# EAGLE board SparkFun_Qwiic_Accelerometer_BMA400-Panel (EAGLE 9.6.2), part 1 of 4
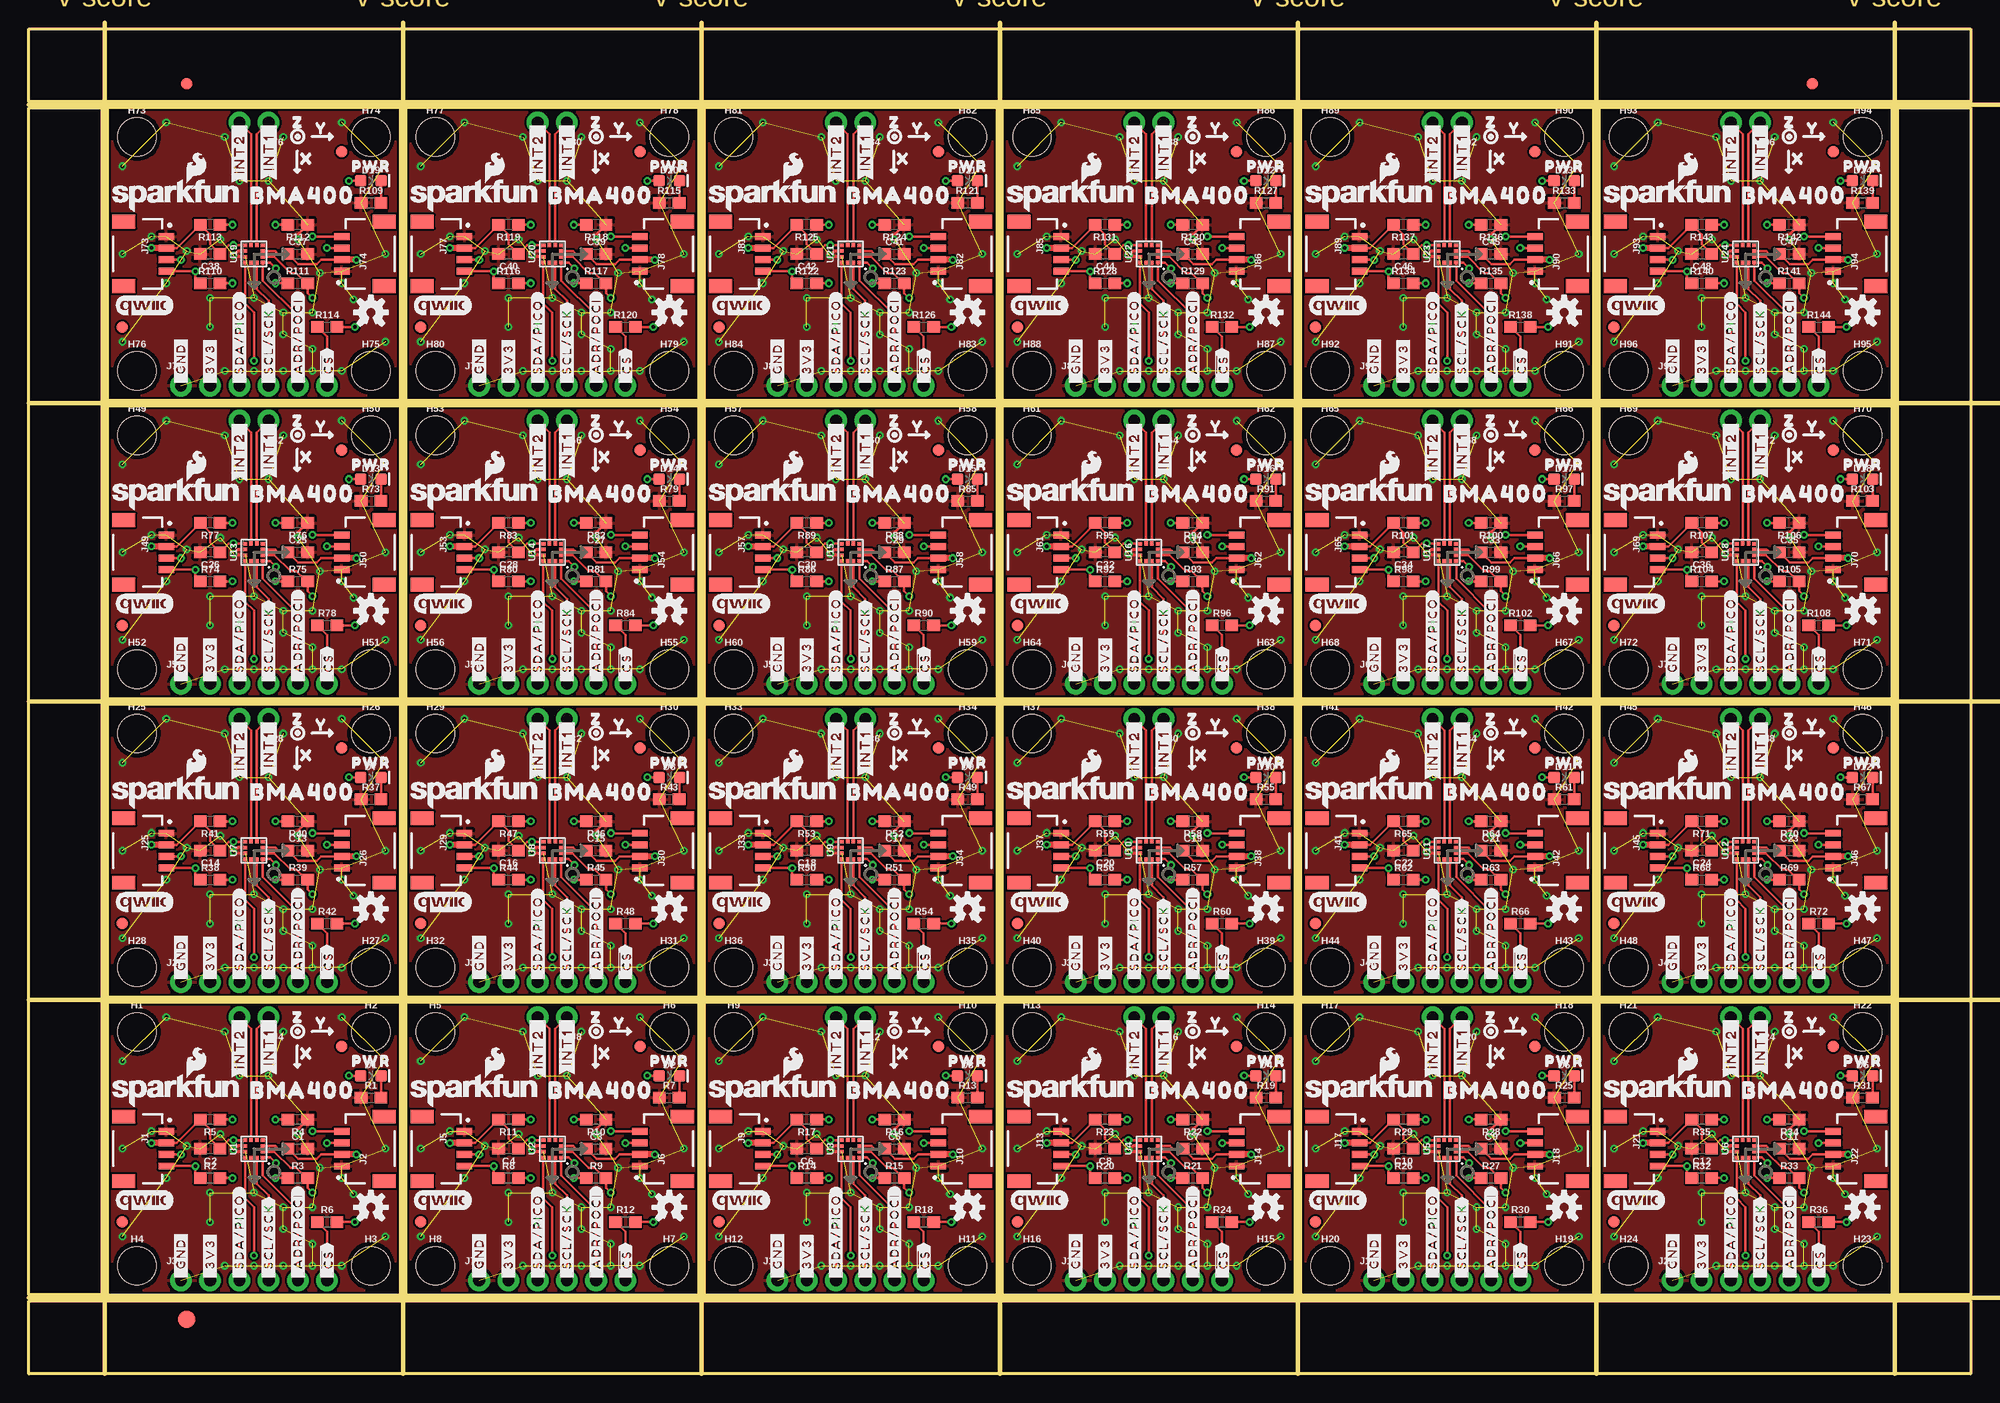
[diagram p0: board, top side]
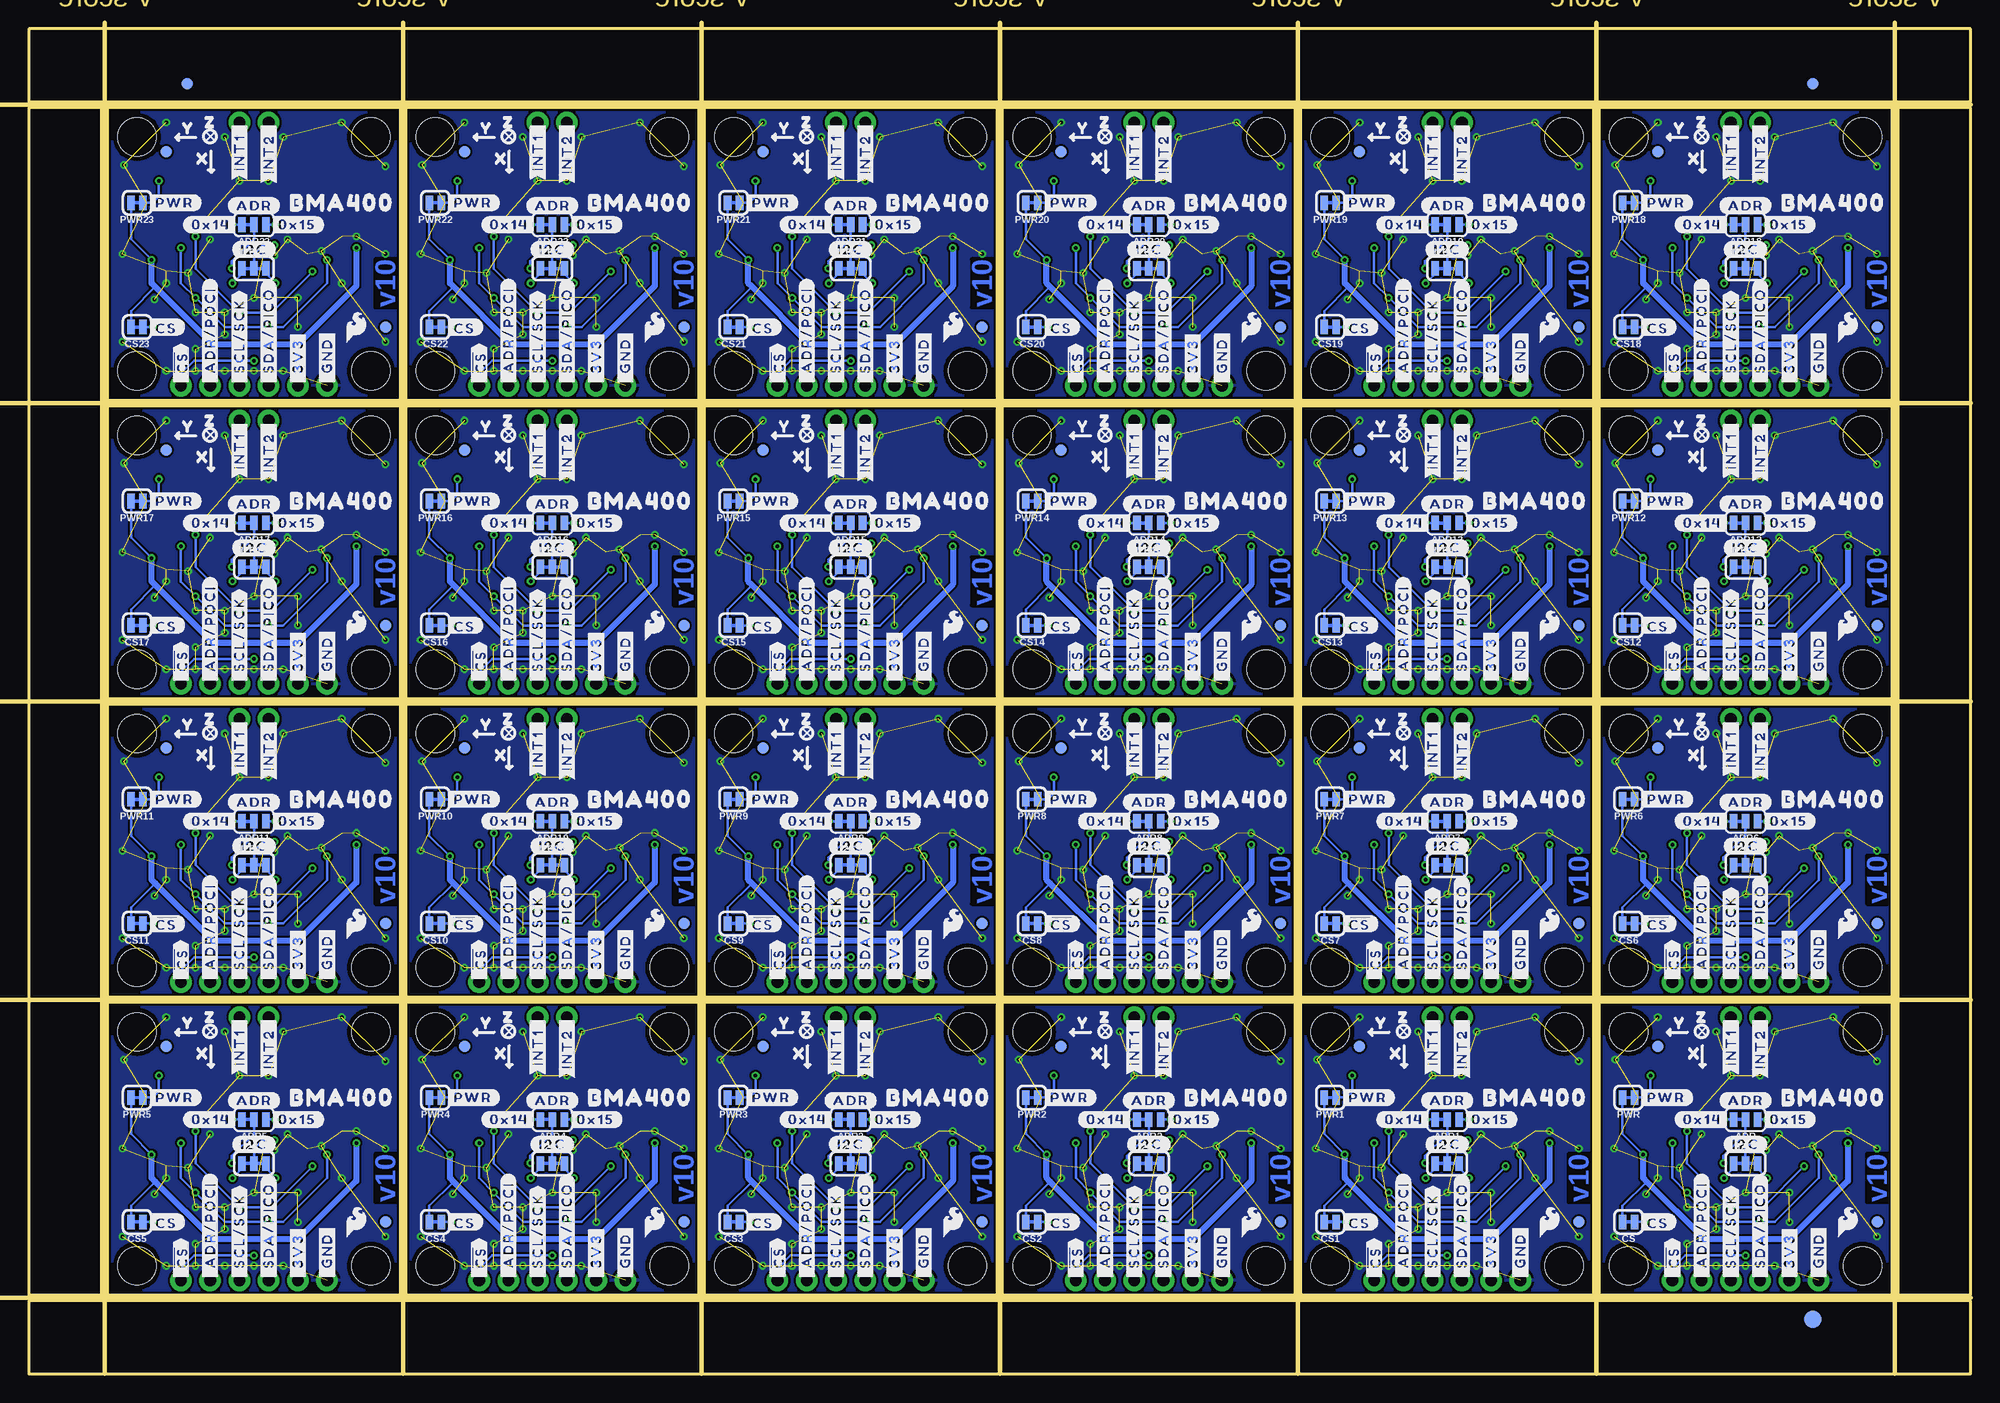
[diagram p1: board, bottom side, seen from below]

Size 168.66 x 116.84 mm. Coordinates in mm from the lower left corner, seen from the top.
Outline: 6.86,6.86 32.26,6.86 32.26,32.26 6.86,32.26 6.86,6.86
Outline: 32.77,6.86 58.17,6.86 58.17,32.26 32.77,32.26 32.77,6.86
Outline: 58.67,6.86 84.07,6.86 84.07,32.26 58.67,32.26 58.67,6.86
Outline: 84.58,6.86 109.98,6.86 109.98,32.26 84.58,32.26 84.58,6.86
Outline: 110.49,6.86 135.89,6.86 135.89,32.26 110.49,32.26 110.49,6.86
Outline: 136.4,6.86 161.8,6.86 161.8,32.26 136.4,32.26 136.4,6.86
Outline: 6.86,32.77 32.26,32.77 32.26,58.17 6.86,58.17 6.86,32.77
Outline: 32.77,32.77 58.17,32.77 58.17,58.17 32.77,58.17 32.77,32.77
Outline: 58.67,32.77 84.07,32.77 84.07,58.17 58.67,58.17 58.67,32.77
Outline: 84.58,32.77 109.98,32.77 109.98,58.17 84.58,58.17 84.58,32.77
Outline: 110.49,32.77 135.89,32.77 135.89,58.17 110.49,58.17 110.49,32.77
Outline: 136.4,32.77 161.8,32.77 161.8,58.17 136.4,58.17 136.4,32.77
Outline: 6.86,58.67 32.26,58.67 32.26,84.07 6.86,84.07 6.86,58.67
Outline: 32.77,58.67 58.17,58.67 58.17,84.07 32.77,84.07 32.77,58.67
Outline: 58.67,58.67 84.07,58.67 84.07,84.07 58.67,84.07 58.67,58.67
Outline: 84.58,58.67 109.98,58.67 109.98,84.07 84.58,84.07 84.58,58.67
Outline: 110.49,58.67 135.89,58.67 135.89,84.07 110.49,84.07 110.49,58.67
Outline: 136.4,58.67 161.8,58.67 161.8,84.07 136.4,84.07 136.4,58.67
Outline: 6.86,84.58 32.26,84.58 32.26,109.98 6.86,109.98 6.86,84.58
Outline: 32.77,84.58 58.17,84.58 58.17,109.98 32.77,109.98 32.77,84.58
Outline: 58.67,84.58 84.07,84.58 84.07,109.98 58.67,109.98 58.67,84.58
Outline: 84.58,84.58 109.98,84.58 109.98,109.98 84.58,109.98 84.58,84.58
Outline: 110.49,84.58 135.89,84.58 135.89,109.98 110.49,109.98 110.49,84.58
Outline: 136.4,84.58 161.8,84.58 161.8,109.98 136.4,109.98 136.4,84.58
Outline: 0,6.35 168.66,6.35 168.66,0 0,0 0,6.35
Outline: 162.31,109.98 168.66,109.98 168.66,6.86 162.31,6.86 162.31,109.98
Outline: 0,116.84 168.66,116.84 168.66,110.49 0,110.49 0,116.84
Outline: 0,109.98 6.35,109.98 6.35,6.86 0,6.86 0,109.98
Copper layers (1*16): Top 0.035mm / dielectric 1.5mm / Bottom 0.035mm
Design rules "SparkFun_Qwiic_Accelerometer_BMA400": minimum track width 7mil, minimum drill 0.3mm, track to track 7mil, track to pad 7mil, pad to pad 7mil, via to via 7mil, smd to smd 7mil, copper to edge 7mil, drill to drill 7mil, minimum pad ring 7mil, minimum via ring 7mil, stop-mask expansion 3mil, vias tented up to drill 25mil, thermal gap 10mil
tRestrict: area 18.7,19.5 to 18.8,19.6; area 44.6,19.5 to 44.8,19.6; area 70.5,19.5 to 70.7,19.6; area 96.4,19.5 to 96.6,19.6; area 122.4,19.5 to 122.5,19.6; area 148.3,19.5 to 148.4,19.6; area 18.7,45.4 to 18.8,45.5; area 44.6,45.4 to 44.8,45.5; area 70.5,45.4 to 70.7,45.5; area 96.4,45.4 to 96.6,45.5; area 122.4,45.4 to 122.5,45.5; area 148.3,45.4 to 148.4,45.5; area 18.7,71.3 to 18.8,71.4; area 44.6,71.3 to 44.8,71.4; area 70.5,71.3 to 70.7,71.4; area 96.4,71.3 to 96.6,71.4; area 122.4,71.3 to 122.5,71.4; area 148.3,71.3 to 148.4,71.4; area 18.7,97.3 to 18.8,97.3; area 44.6,97.3 to 44.8,97.3; area 70.5,97.3 to 70.7,97.3; area 96.4,97.3 to 96.6,97.3; area 122.4,97.3 to 122.5,97.3; area 148.3,97.3 to 148.4,97.3
bRestrict: area 18.3,20.6 to 18.5,21.2; area 44.2,20.6 to 44.4,21.2; area 70.1,20.6 to 70.4,21.2; area 96,20.6 to 96.3,21.2; area 121.9,20.6 to 122.2,21.2; area 147.8,20.6 to 148.1,21.2; area 18.3,46.5 to 18.5,47.1; area 44.2,46.5 to 44.4,47.1; area 70.1,46.5 to 70.4,47.1; area 96,46.5 to 96.3,47.1; area 121.9,46.5 to 122.2,47.1; area 147.8,46.5 to 148.1,47.1; area 18.3,72.4 to 18.5,73; area 44.2,72.4 to 44.4,73; area 70.1,72.4 to 70.4,73; area 96,72.4 to 96.3,73; area 121.9,72.4 to 122.2,73; area 147.8,72.4 to 148.1,73; area 18.3,98.3 to 18.5,98.9; area 44.2,98.3 to 44.4,98.9; area 70.1,98.3 to 70.4,98.9; area 96,98.3 to 96.3,98.9; area 121.9,98.3 to 122.2,98.9; area 147.8,98.3 to 148.1,98.9
Milling: 12 lines

## Footprints (pad centres in the part's own frame; a part is rotated, then mirrored left to right if it is on the bottom)
SMT-JUMPER_2_NC_TRACE_SILK = smd 0.66 x 1.27: 1 -0.521,0; 2 0.521,0
SMT-JUMPER_3_1-NC_TRACE_SILK = smd 0.66 x 1.27: 1 -1.041,0; 2 0,0; 3 1.041,0
0603 = smd 1.1 x 1: 1 -0.85,0; 2 0.85,0
LED-0603 = smd 1 x 1: A -0.877,0; C 0.877,0
FIDUCIAL-1X2 = smd 1 x 1: 1 0,0
FIDUCIAL-1.5X3 = smd 1.5 x 1.5: 1 0,0
STAND-OFF = hole 3.302: 0,0
SMT-JUMPER_3_2-NC_TRACE_SILK = smd 0.66 x 1.27: 1 -1.041,0; 2 0,0; 3 1.041,0
JST04_1MM_RA = smd 0.6 x 1.35: 1 -1.5,0; 2 -0.5,0; 3 0.5,0; 4 1.5,0 | smd 1.2 x 2: NC1 2.8,-3.675; NC2 -2.8,-3.675
1X06_NO_SILK = drill 1.016 pad 1.88: 1 0,0; 2 2.54,0; 3 5.08,0; 4 7.62,0; 5 10.16,0; 6 12.7,0
1X02_NO_SILK = drill 1.016 pad 1.88: 1 0,0; 2 2.54,0
BMA400 = smd 0.3 x 0.35: 1 -0.75,-0.775; 2 -0.25,-0.775; 3 0.25,-0.775; 4 0.75,-0.775; 7 0.75,0.775; 8 0.25,0.775; 9 -0.25,0.775; 10 -0.75,0.775 | smd 0.35 x 0.3: 5 0.775,-0.25; 6 0.775,0.25; 11 -0.775,0.25; 12 -0.775,-0.25

## Placement (x,y rotation side)
!CS!  JUMPER-SMT_2_NC_TRACE_SILK  [SMT-JUMPER_2_NC_TRACE_SILK]  29.72,13.21 180 bottom
!CS!1  JUMPER-SMT_2_NC_TRACE_SILK  [SMT-JUMPER_2_NC_TRACE_SILK]  55.63,13.21 180 bottom
!CS!2  JUMPER-SMT_2_NC_TRACE_SILK  [SMT-JUMPER_2_NC_TRACE_SILK]  81.53,13.21 180 bottom
!CS!3  JUMPER-SMT_2_NC_TRACE_SILK  [SMT-JUMPER_2_NC_TRACE_SILK]  107.44,13.21 180 bottom
!CS!4  JUMPER-SMT_2_NC_TRACE_SILK  [SMT-JUMPER_2_NC_TRACE_SILK]  133.35,13.21 180 bottom
!CS!5  JUMPER-SMT_2_NC_TRACE_SILK  [SMT-JUMPER_2_NC_TRACE_SILK]  159.26,13.21 180 bottom
!CS!6  JUMPER-SMT_2_NC_TRACE_SILK  [SMT-JUMPER_2_NC_TRACE_SILK]  29.72,39.12 180 bottom
!CS!7  JUMPER-SMT_2_NC_TRACE_SILK  [SMT-JUMPER_2_NC_TRACE_SILK]  55.63,39.12 180 bottom
!CS!8  JUMPER-SMT_2_NC_TRACE_SILK  [SMT-JUMPER_2_NC_TRACE_SILK]  81.53,39.12 180 bottom
!CS!9  JUMPER-SMT_2_NC_TRACE_SILK  [SMT-JUMPER_2_NC_TRACE_SILK]  107.44,39.12 180 bottom
!CS!10  JUMPER-SMT_2_NC_TRACE_SILK  [SMT-JUMPER_2_NC_TRACE_SILK]  133.35,39.12 180 bottom
!CS!11  JUMPER-SMT_2_NC_TRACE_SILK  [SMT-JUMPER_2_NC_TRACE_SILK]  159.26,39.12 180 bottom
!CS!12  JUMPER-SMT_2_NC_TRACE_SILK  [SMT-JUMPER_2_NC_TRACE_SILK]  29.72,65.02 180 bottom
!CS!13  JUMPER-SMT_2_NC_TRACE_SILK  [SMT-JUMPER_2_NC_TRACE_SILK]  55.63,65.02 180 bottom
!CS!14  JUMPER-SMT_2_NC_TRACE_SILK  [SMT-JUMPER_2_NC_TRACE_SILK]  81.53,65.02 180 bottom
!CS!15  JUMPER-SMT_2_NC_TRACE_SILK  [SMT-JUMPER_2_NC_TRACE_SILK]  107.44,65.02 180 bottom
!CS!16  JUMPER-SMT_2_NC_TRACE_SILK  [SMT-JUMPER_2_NC_TRACE_SILK]  133.35,65.02 180 bottom
!CS!17  JUMPER-SMT_2_NC_TRACE_SILK  [SMT-JUMPER_2_NC_TRACE_SILK]  159.26,65.02 180 bottom
!CS!18  JUMPER-SMT_2_NC_TRACE_SILK  [SMT-JUMPER_2_NC_TRACE_SILK]  29.72,90.93 180 bottom
!CS!19  JUMPER-SMT_2_NC_TRACE_SILK  [SMT-JUMPER_2_NC_TRACE_SILK]  55.63,90.93 180 bottom
!CS!20  JUMPER-SMT_2_NC_TRACE_SILK  [SMT-JUMPER_2_NC_TRACE_SILK]  81.53,90.93 180 bottom
!CS!21  JUMPER-SMT_2_NC_TRACE_SILK  [SMT-JUMPER_2_NC_TRACE_SILK]  107.44,90.93 180 bottom
!CS!22  JUMPER-SMT_2_NC_TRACE_SILK  [SMT-JUMPER_2_NC_TRACE_SILK]  133.35,90.93 180 bottom
!CS!23  JUMPER-SMT_2_NC_TRACE_SILK  [SMT-JUMPER_2_NC_TRACE_SILK]  159.26,90.93 180 bottom
ADR  JUMPER-SMT_3_1-NC_TRACE_SILK  [SMT-JUMPER_3_1-NC_TRACE_SILK]  19.56,22.1 180 bottom
ADR1  JUMPER-SMT_3_1-NC_TRACE_SILK  [SMT-JUMPER_3_1-NC_TRACE_SILK]  45.47,22.1 180 bottom
ADR2  JUMPER-SMT_3_1-NC_TRACE_SILK  [SMT-JUMPER_3_1-NC_TRACE_SILK]  71.37,22.1 180 bottom
ADR3  JUMPER-SMT_3_1-NC_TRACE_SILK  [SMT-JUMPER_3_1-NC_TRACE_SILK]  97.28,22.1 180 bottom
ADR4  JUMPER-SMT_3_1-NC_TRACE_SILK  [SMT-JUMPER_3_1-NC_TRACE_SILK]  123.19,22.1 180 bottom
ADR5  JUMPER-SMT_3_1-NC_TRACE_SILK  [SMT-JUMPER_3_1-NC_TRACE_SILK]  149.1,22.1 180 bottom
ADR6  JUMPER-SMT_3_1-NC_TRACE_SILK  [SMT-JUMPER_3_1-NC_TRACE_SILK]  19.56,48.01 180 bottom
ADR7  JUMPER-SMT_3_1-NC_TRACE_SILK  [SMT-JUMPER_3_1-NC_TRACE_SILK]  45.47,48.01 180 bottom
ADR8  JUMPER-SMT_3_1-NC_TRACE_SILK  [SMT-JUMPER_3_1-NC_TRACE_SILK]  71.37,48.01 180 bottom
ADR9  JUMPER-SMT_3_1-NC_TRACE_SILK  [SMT-JUMPER_3_1-NC_TRACE_SILK]  97.28,48.01 180 bottom
ADR10  JUMPER-SMT_3_1-NC_TRACE_SILK  [SMT-JUMPER_3_1-NC_TRACE_SILK]  123.19,48.01 180 bottom
ADR11  JUMPER-SMT_3_1-NC_TRACE_SILK  [SMT-JUMPER_3_1-NC_TRACE_SILK]  149.1,48.01 180 bottom
ADR12  JUMPER-SMT_3_1-NC_TRACE_SILK  [SMT-JUMPER_3_1-NC_TRACE_SILK]  19.56,73.91 180 bottom
ADR13  JUMPER-SMT_3_1-NC_TRACE_SILK  [SMT-JUMPER_3_1-NC_TRACE_SILK]  45.47,73.91 180 bottom
ADR14  JUMPER-SMT_3_1-NC_TRACE_SILK  [SMT-JUMPER_3_1-NC_TRACE_SILK]  71.37,73.91 180 bottom
ADR15  JUMPER-SMT_3_1-NC_TRACE_SILK  [SMT-JUMPER_3_1-NC_TRACE_SILK]  97.28,73.91 180 bottom
ADR16  JUMPER-SMT_3_1-NC_TRACE_SILK  [SMT-JUMPER_3_1-NC_TRACE_SILK]  123.19,73.91 180 bottom
ADR17  JUMPER-SMT_3_1-NC_TRACE_SILK  [SMT-JUMPER_3_1-NC_TRACE_SILK]  149.1,73.91 180 bottom
ADR18  JUMPER-SMT_3_1-NC_TRACE_SILK  [SMT-JUMPER_3_1-NC_TRACE_SILK]  19.56,99.82 180 bottom
ADR19  JUMPER-SMT_3_1-NC_TRACE_SILK  [SMT-JUMPER_3_1-NC_TRACE_SILK]  45.47,99.82 180 bottom
ADR20  JUMPER-SMT_3_1-NC_TRACE_SILK  [SMT-JUMPER_3_1-NC_TRACE_SILK]  71.37,99.82 180 bottom
ADR21  JUMPER-SMT_3_1-NC_TRACE_SILK  [SMT-JUMPER_3_1-NC_TRACE_SILK]  97.28,99.82 180 bottom
ADR22  JUMPER-SMT_3_1-NC_TRACE_SILK  [SMT-JUMPER_3_1-NC_TRACE_SILK]  123.19,99.82 180 bottom
ADR23  JUMPER-SMT_3_1-NC_TRACE_SILK  [SMT-JUMPER_3_1-NC_TRACE_SILK]  149.1,99.82 180 bottom
C1  0.1uF  [0603]  23.37,19.56 0 top
C2  0.1uF  [0603]  15.75,19.56 180 top
C3  0.1uF  [0603]  49.28,19.56 0 top
C4  0.1uF  [0603]  41.66,19.56 180 top
C5  0.1uF  [0603]  75.18,19.56 0 top
C6  0.1uF  [0603]  67.56,19.56 180 top
C7  0.1uF  [0603]  101.09,19.56 0 top
C8  0.1uF  [0603]  93.47,19.56 180 top
C9  0.1uF  [0603]  127,19.56 0 top
C10  0.1uF  [0603]  119.38,19.56 180 top
C11  0.1uF  [0603]  152.91,19.56 0 top
C12  0.1uF  [0603]  145.29,19.56 180 top
C13  0.1uF  [0603]  23.37,45.47 0 top
C14  0.1uF  [0603]  15.75,45.47 180 top
C15  0.1uF  [0603]  49.28,45.47 0 top
C16  0.1uF  [0603]  41.66,45.47 180 top
C17  0.1uF  [0603]  75.18,45.47 0 top
C18  0.1uF  [0603]  67.56,45.47 180 top
C19  0.1uF  [0603]  101.09,45.47 0 top
C20  0.1uF  [0603]  93.47,45.47 180 top
C21  0.1uF  [0603]  127,45.47 0 top
C22  0.1uF  [0603]  119.38,45.47 180 top
C23  0.1uF  [0603]  152.91,45.47 0 top
C24  0.1uF  [0603]  145.29,45.47 180 top
C25  0.1uF  [0603]  23.37,71.37 0 top
C26  0.1uF  [0603]  15.75,71.37 180 top
C27  0.1uF  [0603]  49.28,71.37 0 top
C28  0.1uF  [0603]  41.66,71.37 180 top
C29  0.1uF  [0603]  75.18,71.37 0 top
C30  0.1uF  [0603]  67.56,71.37 180 top
C31  0.1uF  [0603]  101.09,71.37 0 top
C32  0.1uF  [0603]  93.47,71.37 180 top
C33  0.1uF  [0603]  127,71.37 0 top
C34  0.1uF  [0603]  119.38,71.37 180 top
C35  0.1uF  [0603]  152.91,71.37 0 top
C36  0.1uF  [0603]  145.29,71.37 180 top
C37  0.1uF  [0603]  23.37,97.28 0 top
C38  0.1uF  [0603]  15.75,97.28 180 top
C39  0.1uF  [0603]  49.28,97.28 0 top
C40  0.1uF  [0603]  41.66,97.28 180 top
C41  0.1uF  [0603]  75.18,97.28 0 top
C42  0.1uF  [0603]  67.56,97.28 180 top
C43  0.1uF  [0603]  101.09,97.28 0 top
C44  0.1uF  [0603]  93.47,97.28 180 top
C45  0.1uF  [0603]  127,97.28 0 top
C46  0.1uF  [0603]  119.38,97.28 180 top
C47  0.1uF  [0603]  152.91,97.28 0 top
C48  0.1uF  [0603]  145.29,97.28 180 top
D1  RED  [LED-0603]  29.72,25.91 0 top
D2  RED  [LED-0603]  55.63,25.91 0 top
D3  RED  [LED-0603]  81.53,25.91 0 top
D4  RED  [LED-0603]  107.44,25.91 0 top
D5  RED  [LED-0603]  133.35,25.91 0 top
D6  RED  [LED-0603]  159.26,25.91 0 top
D7  RED  [LED-0603]  29.72,51.82 0 top
D8  RED  [LED-0603]  55.63,51.82 0 top
D9  RED  [LED-0603]  81.53,51.82 0 top
D10  RED  [LED-0603]  107.44,51.82 0 top
D11  RED  [LED-0603]  133.35,51.82 0 top
D12  RED  [LED-0603]  159.26,51.82 0 top
D13  RED  [LED-0603]  29.72,77.72 0 top
D14  RED  [LED-0603]  55.63,77.72 0 top
D15  RED  [LED-0603]  81.53,77.72 0 top
D16  RED  [LED-0603]  107.44,77.72 0 top
D17  RED  [LED-0603]  133.35,77.72 0 top
D18  RED  [LED-0603]  159.26,77.72 0 top
D19  RED  [LED-0603]  29.72,103.63 0 top
D20  RED  [LED-0603]  55.63,103.63 0 top
D21  RED  [LED-0603]  81.53,103.63 0 top
D22  RED  [LED-0603]  107.44,103.63 0 top
D23  RED  [LED-0603]  133.35,103.63 0 top
D24  RED  [LED-0603]  159.26,103.63 0 top
E$1  [FIDUCIAL-1X2]  13.72,112.08 0 top
E$2  [FIDUCIAL-1X2]  13.72,112.08 0 bottom
E$3  [FIDUCIAL-1X2]  154.88,112.08 0 top
E$4  [FIDUCIAL-1X2]  154.88,112.08 0 bottom
E$5  [FIDUCIAL-1.5X3]  13.72,4.76 0 top
E$6  [FIDUCIAL-1.5X3]  13.72,4.76 0 bottom
FD1  FIDUCIAL1X2  [FIDUCIAL-1X2]  27.18,28.45 0 top
FD2  FIDUCIAL1X2  [FIDUCIAL-1X2]  27.18,28.45 0 bottom
FD3  FIDUCIAL1X2  [FIDUCIAL-1X2]  8.13,13.21 0 bottom
FD4  FIDUCIAL1X2  [FIDUCIAL-1X2]  8.13,13.21 0 top
FD5  FIDUCIAL1X2  [FIDUCIAL-1X2]  53.09,28.45 0 top
FD6  FIDUCIAL1X2  [FIDUCIAL-1X2]  53.09,28.45 0 bottom
FD7  FIDUCIAL1X2  [FIDUCIAL-1X2]  34.04,13.21 0 bottom
FD8  FIDUCIAL1X2  [FIDUCIAL-1X2]  34.04,13.21 0 top
FD9  FIDUCIAL1X2  [FIDUCIAL-1X2]  78.99,28.45 0 top
FD10  FIDUCIAL1X2  [FIDUCIAL-1X2]  78.99,28.45 0 bottom
FD11  FIDUCIAL1X2  [FIDUCIAL-1X2]  59.94,13.21 0 bottom
FD12  FIDUCIAL1X2  [FIDUCIAL-1X2]  59.94,13.21 0 top
FD13  FIDUCIAL1X2  [FIDUCIAL-1X2]  104.9,28.45 0 top
FD14  FIDUCIAL1X2  [FIDUCIAL-1X2]  104.9,28.45 0 bottom
FD15  FIDUCIAL1X2  [FIDUCIAL-1X2]  85.85,13.21 0 bottom
FD16  FIDUCIAL1X2  [FIDUCIAL-1X2]  85.85,13.21 0 top
FD17  FIDUCIAL1X2  [FIDUCIAL-1X2]  130.81,28.45 0 top
FD18  FIDUCIAL1X2  [FIDUCIAL-1X2]  130.81,28.45 0 bottom
FD19  FIDUCIAL1X2  [FIDUCIAL-1X2]  111.76,13.21 0 bottom
FD20  FIDUCIAL1X2  [FIDUCIAL-1X2]  111.76,13.21 0 top
FD21  FIDUCIAL1X2  [FIDUCIAL-1X2]  156.72,28.45 0 top
FD22  FIDUCIAL1X2  [FIDUCIAL-1X2]  156.72,28.45 0 bottom
FD23  FIDUCIAL1X2  [FIDUCIAL-1X2]  137.67,13.21 0 bottom
FD24  FIDUCIAL1X2  [FIDUCIAL-1X2]  137.67,13.21 0 top
FD25  FIDUCIAL1X2  [FIDUCIAL-1X2]  27.18,54.36 0 top
FD26  FIDUCIAL1X2  [FIDUCIAL-1X2]  27.18,54.36 0 bottom
FD27  FIDUCIAL1X2  [FIDUCIAL-1X2]  8.13,39.12 0 bottom
FD28  FIDUCIAL1X2  [FIDUCIAL-1X2]  8.13,39.12 0 top
FD29  FIDUCIAL1X2  [FIDUCIAL-1X2]  53.09,54.36 0 top
FD30  FIDUCIAL1X2  [FIDUCIAL-1X2]  53.09,54.36 0 bottom
FD31  FIDUCIAL1X2  [FIDUCIAL-1X2]  34.04,39.12 0 bottom
FD32  FIDUCIAL1X2  [FIDUCIAL-1X2]  34.04,39.12 0 top
FD33  FIDUCIAL1X2  [FIDUCIAL-1X2]  78.99,54.36 0 top
FD34  FIDUCIAL1X2  [FIDUCIAL-1X2]  78.99,54.36 0 bottom
FD35  FIDUCIAL1X2  [FIDUCIAL-1X2]  59.94,39.12 0 bottom
FD36  FIDUCIAL1X2  [FIDUCIAL-1X2]  59.94,39.12 0 top
FD37  FIDUCIAL1X2  [FIDUCIAL-1X2]  104.9,54.36 0 top
FD38  FIDUCIAL1X2  [FIDUCIAL-1X2]  104.9,54.36 0 bottom
FD39  FIDUCIAL1X2  [FIDUCIAL-1X2]  85.85,39.12 0 bottom
FD40  FIDUCIAL1X2  [FIDUCIAL-1X2]  85.85,39.12 0 top
FD41  FIDUCIAL1X2  [FIDUCIAL-1X2]  130.81,54.36 0 top
FD42  FIDUCIAL1X2  [FIDUCIAL-1X2]  130.81,54.36 0 bottom
FD43  FIDUCIAL1X2  [FIDUCIAL-1X2]  111.76,39.12 0 bottom
FD44  FIDUCIAL1X2  [FIDUCIAL-1X2]  111.76,39.12 0 top
FD45  FIDUCIAL1X2  [FIDUCIAL-1X2]  156.72,54.36 0 top
FD46  FIDUCIAL1X2  [FIDUCIAL-1X2]  156.72,54.36 0 bottom
FD47  FIDUCIAL1X2  [FIDUCIAL-1X2]  137.67,39.12 0 bottom
FD48  FIDUCIAL1X2  [FIDUCIAL-1X2]  137.67,39.12 0 top
FD49  FIDUCIAL1X2  [FIDUCIAL-1X2]  27.18,80.26 0 top
FD50  FIDUCIAL1X2  [FIDUCIAL-1X2]  27.18,80.26 0 bottom
FD51  FIDUCIAL1X2  [FIDUCIAL-1X2]  8.13,65.02 0 bottom
FD52  FIDUCIAL1X2  [FIDUCIAL-1X2]  8.13,65.02 0 top
FD53  FIDUCIAL1X2  [FIDUCIAL-1X2]  53.09,80.26 0 top
FD54  FIDUCIAL1X2  [FIDUCIAL-1X2]  53.09,80.26 0 bottom
FD55  FIDUCIAL1X2  [FIDUCIAL-1X2]  34.04,65.02 0 bottom
FD56  FIDUCIAL1X2  [FIDUCIAL-1X2]  34.04,65.02 0 top
FD57  FIDUCIAL1X2  [FIDUCIAL-1X2]  78.99,80.26 0 top
FD58  FIDUCIAL1X2  [FIDUCIAL-1X2]  78.99,80.26 0 bottom
FD59  FIDUCIAL1X2  [FIDUCIAL-1X2]  59.94,65.02 0 bottom
FD60  FIDUCIAL1X2  [FIDUCIAL-1X2]  59.94,65.02 0 top
FD61  FIDUCIAL1X2  [FIDUCIAL-1X2]  104.9,80.26 0 top
FD62  FIDUCIAL1X2  [FIDUCIAL-1X2]  104.9,80.26 0 bottom
FD63  FIDUCIAL1X2  [FIDUCIAL-1X2]  85.85,65.02 0 bottom
FD64  FIDUCIAL1X2  [FIDUCIAL-1X2]  85.85,65.02 0 top
FD65  FIDUCIAL1X2  [FIDUCIAL-1X2]  130.81,80.26 0 top
FD66  FIDUCIAL1X2  [FIDUCIAL-1X2]  130.81,80.26 0 bottom
FD67  FIDUCIAL1X2  [FIDUCIAL-1X2]  111.76,65.02 0 bottom
FD68  FIDUCIAL1X2  [FIDUCIAL-1X2]  111.76,65.02 0 top
FD69  FIDUCIAL1X2  [FIDUCIAL-1X2]  156.72,80.26 0 top
FD70  FIDUCIAL1X2  [FIDUCIAL-1X2]  156.72,80.26 0 bottom
FD71  FIDUCIAL1X2  [FIDUCIAL-1X2]  137.67,65.02 0 bottom
FD72  FIDUCIAL1X2  [FIDUCIAL-1X2]  137.67,65.02 0 top
FD73  FIDUCIAL1X2  [FIDUCIAL-1X2]  27.18,106.17 0 top
FD74  FIDUCIAL1X2  [FIDUCIAL-1X2]  27.18,106.17 0 bottom
FD75  FIDUCIAL1X2  [FIDUCIAL-1X2]  8.13,90.93 0 bottom
FD76  FIDUCIAL1X2  [FIDUCIAL-1X2]  8.13,90.93 0 top
FD77  FIDUCIAL1X2  [FIDUCIAL-1X2]  53.09,106.17 0 top
FD78  FIDUCIAL1X2  [FIDUCIAL-1X2]  53.09,106.17 0 bottom
FD79  FIDUCIAL1X2  [FIDUCIAL-1X2]  34.04,90.93 0 bottom
FD80  FIDUCIAL1X2  [FIDUCIAL-1X2]  34.04,90.93 0 top
FD81  FIDUCIAL1X2  [FIDUCIAL-1X2]  78.99,106.17 0 top
FD82  FIDUCIAL1X2  [FIDUCIAL-1X2]  78.99,106.17 0 bottom
FD83  FIDUCIAL1X2  [FIDUCIAL-1X2]  59.94,90.93 0 bottom
FD84  FIDUCIAL1X2  [FIDUCIAL-1X2]  59.94,90.93 0 top
FD85  FIDUCIAL1X2  [FIDUCIAL-1X2]  104.9,106.17 0 top
FD86  FIDUCIAL1X2  [FIDUCIAL-1X2]  104.9,106.17 0 bottom
FD87  FIDUCIAL1X2  [FIDUCIAL-1X2]  85.85,90.93 0 bottom
FD88  FIDUCIAL1X2  [FIDUCIAL-1X2]  85.85,90.93 0 top
FD89  FIDUCIAL1X2  [FIDUCIAL-1X2]  130.81,106.17 0 top
FD90  FIDUCIAL1X2  [FIDUCIAL-1X2]  130.81,106.17 0 bottom
FD91  FIDUCIAL1X2  [FIDUCIAL-1X2]  111.76,90.93 0 bottom
FD92  FIDUCIAL1X2  [FIDUCIAL-1X2]  111.76,90.93 0 top
FD93  FIDUCIAL1X2  [FIDUCIAL-1X2]  156.72,106.17 0 top
FD94  FIDUCIAL1X2  [FIDUCIAL-1X2]  156.72,106.17 0 bottom
FD95  FIDUCIAL1X2  [FIDUCIAL-1X2]  137.67,90.93 0 bottom
FD96  FIDUCIAL1X2  [FIDUCIAL-1X2]  137.67,90.93 0 top
H1  STAND-OFF  [STAND-OFF]  9.4,29.72 0 top
H2  STAND-OFF  [STAND-OFF]  29.72,29.72 0 top
H3  STAND-OFF  [STAND-OFF]  29.72,9.4 0 top
H4  STAND-OFF  [STAND-OFF]  9.4,9.4 0 top
H5  STAND-OFF  [STAND-OFF]  35.31,29.72 0 top
H6  STAND-OFF  [STAND-OFF]  55.63,29.72 0 top
H7  STAND-OFF  [STAND-OFF]  55.63,9.4 0 top
H8  STAND-OFF  [STAND-OFF]  35.31,9.4 0 top
H9  STAND-OFF  [STAND-OFF]  61.21,29.72 0 top
H10  STAND-OFF  [STAND-OFF]  81.53,29.72 0 top
H11  STAND-OFF  [STAND-OFF]  81.53,9.4 0 top
H12  STAND-OFF  [STAND-OFF]  61.21,9.4 0 top
H13  STAND-OFF  [STAND-OFF]  87.12,29.72 0 top
H14  STAND-OFF  [STAND-OFF]  107.44,29.72 0 top
H15  STAND-OFF  [STAND-OFF]  107.44,9.4 0 top
H16  STAND-OFF  [STAND-OFF]  87.12,9.4 0 top
H17  STAND-OFF  [STAND-OFF]  113.03,29.72 0 top
H18  STAND-OFF  [STAND-OFF]  133.35,29.72 0 top
H19  STAND-OFF  [STAND-OFF]  133.35,9.4 0 top
H20  STAND-OFF  [STAND-OFF]  113.03,9.4 0 top
H21  STAND-OFF  [STAND-OFF]  138.94,29.72 0 top
H22  STAND-OFF  [STAND-OFF]  159.26,29.72 0 top
H23  STAND-OFF  [STAND-OFF]  159.26,9.4 0 top
H24  STAND-OFF  [STAND-OFF]  138.94,9.4 0 top
H25  STAND-OFF  [STAND-OFF]  9.4,55.63 0 top
H26  STAND-OFF  [STAND-OFF]  29.72,55.63 0 top
H27  STAND-OFF  [STAND-OFF]  29.72,35.31 0 top
H28  STAND-OFF  [STAND-OFF]  9.4,35.31 0 top
H29  STAND-OFF  [STAND-OFF]  35.31,55.63 0 top
H30  STAND-OFF  [STAND-OFF]  55.63,55.63 0 top
H31  STAND-OFF  [STAND-OFF]  55.63,35.31 0 top
H32  STAND-OFF  [STAND-OFF]  35.31,35.31 0 top
H33  STAND-OFF  [STAND-OFF]  61.21,55.63 0 top
H34  STAND-OFF  [STAND-OFF]  81.53,55.63 0 top
H35  STAND-OFF  [STAND-OFF]  81.53,35.31 0 top
H36  STAND-OFF  [STAND-OFF]  61.21,35.31 0 top
H37  STAND-OFF  [STAND-OFF]  87.12,55.63 0 top
H38  STAND-OFF  [STAND-OFF]  107.44,55.63 0 top
H39  STAND-OFF  [STAND-OFF]  107.44,35.31 0 top
H40  STAND-OFF  [STAND-OFF]  87.12,35.31 0 top
H41  STAND-OFF  [STAND-OFF]  113.03,55.63 0 top
H42  STAND-OFF  [STAND-OFF]  133.35,55.63 0 top
H43  STAND-OFF  [STAND-OFF]  133.35,35.31 0 top
H44  STAND-OFF  [STAND-OFF]  113.03,35.31 0 top
H45  STAND-OFF  [STAND-OFF]  138.94,55.63 0 top
H46  STAND-OFF  [STAND-OFF]  159.26,55.63 0 top
H47  STAND-OFF  [STAND-OFF]  159.26,35.31 0 top
H48  STAND-OFF  [STAND-OFF]  138.94,35.31 0 top
H49  STAND-OFF  [STAND-OFF]  9.4,81.53 0 top
H50  STAND-OFF  [STAND-OFF]  29.72,81.53 0 top
H51  STAND-OFF  [STAND-OFF]  29.72,61.21 0 top
H52  STAND-OFF  [STAND-OFF]  9.4,61.21 0 top
H53  STAND-OFF  [STAND-OFF]  35.31,81.53 0 top
H54  STAND-OFF  [STAND-OFF]  55.63,81.53 0 top
H55  STAND-OFF  [STAND-OFF]  55.63,61.21 0 top
H56  STAND-OFF  [STAND-OFF]  35.31,61.21 0 top
H57  STAND-OFF  [STAND-OFF]  61.21,81.53 0 top
H58  STAND-OFF  [STAND-OFF]  81.53,81.53 0 top
H59  STAND-OFF  [STAND-OFF]  81.53,61.21 0 top
H60  STAND-OFF  [STAND-OFF]  61.21,61.21 0 top
H61  STAND-OFF  [STAND-OFF]  87.12,81.53 0 top
H62  STAND-OFF  [STAND-OFF]  107.44,81.53 0 top
H63  STAND-OFF  [STAND-OFF]  107.44,61.21 0 top
H64  STAND-OFF  [STAND-OFF]  87.12,61.21 0 top
H65  STAND-OFF  [STAND-OFF]  113.03,81.53 0 top
H66  STAND-OFF  [STAND-OFF]  133.35,81.53 0 top
H67  STAND-OFF  [STAND-OFF]  133.35,61.21 0 top
H68  STAND-OFF  [STAND-OFF]  113.03,61.21 0 top
H69  STAND-OFF  [STAND-OFF]  138.94,81.53 0 top
H70  STAND-OFF  [STAND-OFF]  159.26,81.53 0 top
H71  STAND-OFF  [STAND-OFF]  159.26,61.21 0 top
H72  STAND-OFF  [STAND-OFF]  138.94,61.21 0 top
H73  STAND-OFF  [STAND-OFF]  9.4,107.44 0 top
H74  STAND-OFF  [STAND-OFF]  29.72,107.44 0 top
H75  STAND-OFF  [STAND-OFF]  29.72,87.12 0 top
H76  STAND-OFF  [STAND-OFF]  9.4,87.12 0 top
H77  STAND-OFF  [STAND-OFF]  35.31,107.44 0 top
H78  STAND-OFF  [STAND-OFF]  55.63,107.44 0 top
H79  STAND-OFF  [STAND-OFF]  55.63,87.12 0 top
H80  STAND-OFF  [STAND-OFF]  35.31,87.12 0 top
H81  STAND-OFF  [STAND-OFF]  61.21,107.44 0 top
H82  STAND-OFF  [STAND-OFF]  81.53,107.44 0 top
H83  STAND-OFF  [STAND-OFF]  81.53,87.12 0 top
H84  STAND-OFF  [STAND-OFF]  61.21,87.12 0 top
H85  STAND-OFF  [STAND-OFF]  87.12,107.44 0 top
H86  STAND-OFF  [STAND-OFF]  107.44,107.44 0 top
H87  STAND-OFF  [STAND-OFF]  107.44,87.12 0 top
H88  STAND-OFF  [STAND-OFF]  87.12,87.12 0 top
H89  STAND-OFF  [STAND-OFF]  113.03,107.44 0 top
H90  STAND-OFF  [STAND-OFF]  133.35,107.44 0 top
H91  STAND-OFF  [STAND-OFF]  133.35,87.12 0 top
H92  STAND-OFF  [STAND-OFF]  113.03,87.12 0 top
H93  STAND-OFF  [STAND-OFF]  138.94,107.44 0 top
H94  STAND-OFF  [STAND-OFF]  159.26,107.44 0 top
H95  STAND-OFF  [STAND-OFF]  159.26,87.12 0 top
H96  STAND-OFF  [STAND-OFF]  138.94,87.12 0 top
I2C  JUMPER-SMT_3_2-NC_TRACE_SILK  [SMT-JUMPER_3_2-NC_TRACE_SILK]  19.56,18.29 0 bottom
I2C1  JUMPER-SMT_3_2-NC_TRACE_SILK  [SMT-JUMPER_3_2-NC_TRACE_SILK]  45.47,18.29 0 bottom
I2C2  JUMPER-SMT_3_2-NC_TRACE_SILK  [SMT-JUMPER_3_2-NC_TRACE_SILK]  71.37,18.29 0 bottom
I2C3  JUMPER-SMT_3_2-NC_TRACE_SILK  [SMT-JUMPER_3_2-NC_TRACE_SILK]  97.28,18.29 0 bottom
I2C4  JUMPER-SMT_3_2-NC_TRACE_SILK  [SMT-JUMPER_3_2-NC_TRACE_SILK]  123.19,18.29 0 bottom
I2C5  JUMPER-SMT_3_2-NC_TRACE_SILK  [SMT-JUMPER_3_2-NC_TRACE_SILK]  149.1,18.29 0 bottom
I2C6  JUMPER-SMT_3_2-NC_TRACE_SILK  [SMT-JUMPER_3_2-NC_TRACE_SILK]  19.56,44.2 0 bottom
I2C7  JUMPER-SMT_3_2-NC_TRACE_SILK  [SMT-JUMPER_3_2-NC_TRACE_SILK]  45.47,44.2 0 bottom
I2C8  JUMPER-SMT_3_2-NC_TRACE_SILK  [SMT-JUMPER_3_2-NC_TRACE_SILK]  71.37,44.2 0 bottom
I2C9  JUMPER-SMT_3_2-NC_TRACE_SILK  [SMT-JUMPER_3_2-NC_TRACE_SILK]  97.28,44.2 0 bottom
I2C10  JUMPER-SMT_3_2-NC_TRACE_SILK  [SMT-JUMPER_3_2-NC_TRACE_SILK]  123.19,44.2 0 bottom
I2C11  JUMPER-SMT_3_2-NC_TRACE_SILK  [SMT-JUMPER_3_2-NC_TRACE_SILK]  149.1,44.2 0 bottom
I2C12  JUMPER-SMT_3_2-NC_TRACE_SILK  [SMT-JUMPER_3_2-NC_TRACE_SILK]  19.56,70.1 0 bottom
I2C13  JUMPER-SMT_3_2-NC_TRACE_SILK  [SMT-JUMPER_3_2-NC_TRACE_SILK]  45.47,70.1 0 bottom
I2C14  JUMPER-SMT_3_2-NC_TRACE_SILK  [SMT-JUMPER_3_2-NC_TRACE_SILK]  71.37,70.1 0 bottom
I2C15  JUMPER-SMT_3_2-NC_TRACE_SILK  [SMT-JUMPER_3_2-NC_TRACE_SILK]  97.28,70.1 0 bottom
I2C16  JUMPER-SMT_3_2-NC_TRACE_SILK  [SMT-JUMPER_3_2-NC_TRACE_SILK]  123.19,70.1 0 bottom
I2C17  JUMPER-SMT_3_2-NC_TRACE_SILK  [SMT-JUMPER_3_2-NC_TRACE_SILK]  149.1,70.1 0 bottom
I2C18  JUMPER-SMT_3_2-NC_TRACE_SILK  [SMT-JUMPER_3_2-NC_TRACE_SILK]  19.56,96.01 0 bottom
I2C19  JUMPER-SMT_3_2-NC_TRACE_SILK  [SMT-JUMPER_3_2-NC_TRACE_SILK]  45.47,96.01 0 bottom
I2C20  JUMPER-SMT_3_2-NC_TRACE_SILK  [SMT-JUMPER_3_2-NC_TRACE_SILK]  71.37,96.01 0 bottom
I2C21  JUMPER-SMT_3_2-NC_TRACE_SILK  [SMT-JUMPER_3_2-NC_TRACE_SILK]  97.28,96.01 0 bottom
I2C22  JUMPER-SMT_3_2-NC_TRACE_SILK  [SMT-JUMPER_3_2-NC_TRACE_SILK]  123.19,96.01 0 bottom
I2C23  JUMPER-SMT_3_2-NC_TRACE_SILK  [SMT-JUMPER_3_2-NC_TRACE_SILK]  149.1,96.01 0 bottom
J1  QWIIC_RIGHT_ANGLE  [JST04_1MM_RA]  11.94,19.56 270 top
J2  QWIIC_RIGHT_ANGLE  [JST04_1MM_RA]  27.18,19.56 90 top
J3  [1X06_NO_SILK]  13.21,8.13 0 top
J4  [1X02_NO_SILK]  20.83,30.99 180 top
J5  QWIIC_RIGHT_ANGLE  [JST04_1MM_RA]  37.85,19.56 270 top
J6  QWIIC_RIGHT_ANGLE  [JST04_1MM_RA]  53.09,19.56 90 top
J7  [1X06_NO_SILK]  39.12,8.13 0 top
J8  [1X02_NO_SILK]  46.74,30.99 180 top
J9  QWIIC_RIGHT_ANGLE  [JST04_1MM_RA]  63.75,19.56 270 top
J10  QWIIC_RIGHT_ANGLE  [JST04_1MM_RA]  78.99,19.56 90 top
J11  [1X06_NO_SILK]  65.02,8.13 0 top
J12  [1X02_NO_SILK]  72.64,30.99 180 top
J13  QWIIC_RIGHT_ANGLE  [JST04_1MM_RA]  89.66,19.56 270 top
J14  QWIIC_RIGHT_ANGLE  [JST04_1MM_RA]  104.9,19.56 90 top
J15  [1X06_NO_SILK]  90.93,8.13 0 top
J16  [1X02_NO_SILK]  98.55,30.99 180 top
J17  QWIIC_RIGHT_ANGLE  [JST04_1MM_RA]  115.57,19.56 270 top
J18  QWIIC_RIGHT_ANGLE  [JST04_1MM_RA]  130.81,19.56 90 top
J19  [1X06_NO_SILK]  116.84,8.13 0 top
J20  [1X02_NO_SILK]  124.46,30.99 180 top
J21  QWIIC_RIGHT_ANGLE  [JST04_1MM_RA]  141.48,19.56 270 top
J22  QWIIC_RIGHT_ANGLE  [JST04_1MM_RA]  156.72,19.56 90 top
J23  [1X06_NO_SILK]  142.75,8.13 0 top
J24  [1X02_NO_SILK]  150.37,30.99 180 top
J25  QWIIC_RIGHT_ANGLE  [JST04_1MM_RA]  11.94,45.47 270 top
J26  QWIIC_RIGHT_ANGLE  [JST04_1MM_RA]  27.18,45.47 90 top
J27  [1X06_NO_SILK]  13.21,34.04 0 top
J28  [1X02_NO_SILK]  20.83,56.9 180 top
J29  QWIIC_RIGHT_ANGLE  [JST04_1MM_RA]  37.85,45.47 270 top
J30  QWIIC_RIGHT_ANGLE  [JST04_1MM_RA]  53.09,45.47 90 top
J31  [1X06_NO_SILK]  39.12,34.04 0 top
J32  [1X02_NO_SILK]  46.74,56.9 180 top
J33  QWIIC_RIGHT_ANGLE  [JST04_1MM_RA]  63.75,45.47 270 top
J34  QWIIC_RIGHT_ANGLE  [JST04_1MM_RA]  78.99,45.47 90 top
J35  [1X06_NO_SILK]  65.02,34.04 0 top
J36  [1X02_NO_SILK]  72.64,56.9 180 top
J37  QWIIC_RIGHT_ANGLE  [JST04_1MM_RA]  89.66,45.47 270 top
J38  QWIIC_RIGHT_ANGLE  [JST04_1MM_RA]  104.9,45.47 90 top
J39  [1X06_NO_SILK]  90.93,34.04 0 top
J40  [1X02_NO_SILK]  98.55,56.9 180 top
J41  QWIIC_RIGHT_ANGLE  [JST04_1MM_RA]  115.57,45.47 270 top
J42  QWIIC_RIGHT_ANGLE  [JST04_1MM_RA]  130.81,45.47 90 top
J43  [1X06_NO_SILK]  116.84,34.04 0 top
J44  [1X02_NO_SILK]  124.46,56.9 180 top
J45  QWIIC_RIGHT_ANGLE  [JST04_1MM_RA]  141.48,45.47 270 top
J46  QWIIC_RIGHT_ANGLE  [JST04_1MM_RA]  156.72,45.47 90 top
J47  [1X06_NO_SILK]  142.75,34.04 0 top
J48  [1X02_NO_SILK]  150.37,56.9 180 top
J49  QWIIC_RIGHT_ANGLE  [JST04_1MM_RA]  11.94,71.37 270 top
J50  QWIIC_RIGHT_ANGLE  [JST04_1MM_RA]  27.18,71.37 90 top
J51  [1X06_NO_SILK]  13.21,59.94 0 top
J52  [1X02_NO_SILK]  20.83,82.8 180 top
J53  QWIIC_RIGHT_ANGLE  [JST04_1MM_RA]  37.85,71.37 270 top
J54  QWIIC_RIGHT_ANGLE  [JST04_1MM_RA]  53.09,71.37 90 top
J55  [1X06_NO_SILK]  39.12,59.94 0 top
J56  [1X02_NO_SILK]  46.74,82.8 180 top
J57  QWIIC_RIGHT_ANGLE  [JST04_1MM_RA]  63.75,71.37 270 top
J58  QWIIC_RIGHT_ANGLE  [JST04_1MM_RA]  78.99,71.37 90 top
J59  [1X06_NO_SILK]  65.02,59.94 0 top
J60  [1X02_NO_SILK]  72.64,82.8 180 top
J61  QWIIC_RIGHT_ANGLE  [JST04_1MM_RA]  89.66,71.37 270 top
J62  QWIIC_RIGHT_ANGLE  [JST04_1MM_RA]  104.9,71.37 90 top
J63  [1X06_NO_SILK]  90.93,59.94 0 top
J64  [1X02_NO_SILK]  98.55,82.8 180 top
J65  QWIIC_RIGHT_ANGLE  [JST04_1MM_RA]  115.57,71.37 270 top
J66  QWIIC_RIGHT_ANGLE  [JST04_1MM_RA]  130.81,71.37 90 top
J67  [1X06_NO_SILK]  116.84,59.94 0 top
J68  [1X02_NO_SILK]  124.46,82.8 180 top
J69  QWIIC_RIGHT_ANGLE  [JST04_1MM_RA]  141.48,71.37 270 top
J70  QWIIC_RIGHT_ANGLE  [JST04_1MM_RA]  156.72,71.37 90 top
J71  [1X06_NO_SILK]  142.75,59.94 0 top
J72  [1X02_NO_SILK]  150.37,82.8 180 top
J73  QWIIC_RIGHT_ANGLE  [JST04_1MM_RA]  11.94,97.28 270 top
J74  QWIIC_RIGHT_ANGLE  [JST04_1MM_RA]  27.18,97.28 90 top
J75  [1X06_NO_SILK]  13.21,85.85 0 top
J76  [1X02_NO_SILK]  20.83,108.71 180 top
J77  QWIIC_RIGHT_ANGLE  [JST04_1MM_RA]  37.85,97.28 270 top
J78  QWIIC_RIGHT_ANGLE  [JST04_1MM_RA]  53.09,97.28 90 top
J79  [1X06_NO_SILK]  39.12,85.85 0 top
J80  [1X02_NO_SILK]  46.74,108.71 180 top
J81  QWIIC_RIGHT_ANGLE  [JST04_1MM_RA]  63.75,97.28 270 top
J82  QWIIC_RIGHT_ANGLE  [JST04_1MM_RA]  78.99,97.28 90 top
J83  [1X06_NO_SILK]  65.02,85.85 0 top
J84  [1X02_NO_SILK]  72.64,108.71 180 top
J85  QWIIC_RIGHT_ANGLE  [JST04_1MM_RA]  89.66,97.28 270 top
J86  QWIIC_RIGHT_ANGLE  [JST04_1MM_RA]  104.9,97.28 90 top
J87  [1X06_NO_SILK]  90.93,85.85 0 top
J88  [1X02_NO_SILK]  98.55,108.71 180 top
J89  QWIIC_RIGHT_ANGLE  [JST04_1MM_RA]  115.57,97.28 270 top
J90  QWIIC_RIGHT_ANGLE  [JST04_1MM_RA]  130.81,97.28 90 top
J91  [1X06_NO_SILK]  116.84,85.85 0 top
J92  [1X02_NO_SILK]  124.46,108.71 180 top
J93  QWIIC_RIGHT_ANGLE  [JST04_1MM_RA]  141.48,97.28 270 top
J94  QWIIC_RIGHT_ANGLE  [JST04_1MM_RA]  156.72,97.28 90 top
J95  [1X06_NO_SILK]  142.75,85.85 0 top
J96  [1X02_NO_SILK]  150.37,108.71 180 top
LOGO1  QWIIC_LOGO_5MM  [QWIIC_5MM]  10.03,15.11 0 top
LOGO2  SFE_LOGO_NAME_FLAME.1_INCH  [SFE_LOGO_NAME_FLAME_.1]  12.83,24.64 0 top
LOGO3  OSHW-LOGOS  [OSHW-LOGO-S]  29.72,14.48 0 top
LOGO4  QWIIC_LOGO_5MM  [QWIIC_5MM]  35.94,15.11 0 top
LOGO5  SFE_LOGO_NAME_FLAME.1_INCH  [SFE_LOGO_NAME_FLAME_.1]  38.73,24.64 0 top
LOGO6  OSHW-LOGOS  [OSHW-LOGO-S]  55.63,14.48 0 top
LOGO7  QWIIC_LOGO_5MM  [QWIIC_5MM]  61.85,15.11 0 top
LOGO8  SFE_LOGO_NAME_FLAME.1_INCH  [SFE_LOGO_NAME_FLAME_.1]  64.64,24.64 0 top
LOGO9  OSHW-LOGOS  [OSHW-LOGO-S]  81.53,14.48 0 top
LOGO10  QWIIC_LOGO_5MM  [QWIIC_5MM]  87.76,15.11 0 top
LOGO11  SFE_LOGO_NAME_FLAME.1_INCH  [SFE_LOGO_NAME_FLAME_.1]  90.55,24.64 0 top
LOGO12  OSHW-LOGOS  [OSHW-LOGO-S]  107.44,14.48 0 top
LOGO13  QWIIC_LOGO_5MM  [QWIIC_5MM]  113.67,15.11 0 top
LOGO14  SFE_LOGO_NAME_FLAME.1_INCH  [SFE_LOGO_NAME_FLAME_.1]  116.46,24.64 0 top
LOGO15  OSHW-LOGOS  [OSHW-LOGO-S]  133.35,14.48 0 top
LOGO16  QWIIC_LOGO_5MM  [QWIIC_5MM]  139.57,15.11 0 top
LOGO17  SFE_LOGO_NAME_FLAME.1_INCH  [SFE_LOGO_NAME_FLAME_.1]  142.37,24.64 0 top
LOGO18  OSHW-LOGOS  [OSHW-LOGO-S]  159.26,14.48 0 top
LOGO19  QWIIC_LOGO_5MM  [QWIIC_5MM]  10.03,41.02 0 top
LOGO20  SFE_LOGO_NAME_FLAME.1_INCH  [SFE_LOGO_NAME_FLAME_.1]  12.83,50.55 0 top
LOGO21  OSHW-LOGOS  [OSHW-LOGO-S]  29.72,40.39 0 top
LOGO22  QWIIC_LOGO_5MM  [QWIIC_5MM]  35.94,41.02 0 top
LOGO23  SFE_LOGO_NAME_FLAME.1_INCH  [SFE_LOGO_NAME_FLAME_.1]  38.73,50.55 0 top
LOGO24  OSHW-LOGOS  [OSHW-LOGO-S]  55.63,40.39 0 top
LOGO25  QWIIC_LOGO_5MM  [QWIIC_5MM]  61.85,41.02 0 top
LOGO26  SFE_LOGO_NAME_FLAME.1_INCH  [SFE_LOGO_NAME_FLAME_.1]  64.64,50.55 0 top
LOGO27  OSHW-LOGOS  [OSHW-LOGO-S]  81.53,40.39 0 top
LOGO28  QWIIC_LOGO_5MM  [QWIIC_5MM]  87.76,41.02 0 top
LOGO29  SFE_LOGO_NAME_FLAME.1_INCH  [SFE_LOGO_NAME_FLAME_.1]  90.55,50.55 0 top
LOGO30  OSHW-LOGOS  [OSHW-LOGO-S]  107.44,40.39 0 top
LOGO31  QWIIC_LOGO_5MM  [QWIIC_5MM]  113.67,41.02 0 top
LOGO32  SFE_LOGO_NAME_FLAME.1_INCH  [SFE_LOGO_NAME_FLAME_.1]  116.46,50.55 0 top
LOGO33  OSHW-LOGOS  [OSHW-LOGO-S]  133.35,40.39 0 top
LOGO34  QWIIC_LOGO_5MM  [QWIIC_5MM]  139.57,41.02 0 top
LOGO35  SFE_LOGO_NAME_FLAME.1_INCH  [SFE_LOGO_NAME_FLAME_.1]  142.37,50.55 0 top
LOGO36  OSHW-LOGOS  [OSHW-LOGO-S]  159.26,40.39 0 top
LOGO37  QWIIC_LOGO_5MM  [QWIIC_5MM]  10.03,66.93 0 top
LOGO38  SFE_LOGO_NAME_FLAME.1_INCH  [SFE_LOGO_NAME_FLAME_.1]  12.83,76.45 0 top
LOGO39  OSHW-LOGOS  [OSHW-LOGO-S]  29.72,66.29 0 top
LOGO40  QWIIC_LOGO_5MM  [QWIIC_5MM]  35.94,66.93 0 top
LOGO41  SFE_LOGO_NAME_FLAME.1_INCH  [SFE_LOGO_NAME_FLAME_.1]  38.73,76.45 0 top
LOGO42  OSHW-LOGOS  [OSHW-LOGO-S]  55.63,66.29 0 top
LOGO43  QWIIC_LOGO_5MM  [QWIIC_5MM]  61.85,66.93 0 top
LOGO44  SFE_LOGO_NAME_FLAME.1_INCH  [SFE_LOGO_NAME_FLAME_.1]  64.64,76.45 0 top
LOGO45  OSHW-LOGOS  [OSHW-LOGO-S]  81.53,66.29 0 top
LOGO46  QWIIC_LOGO_5MM  [QWIIC_5MM]  87.76,66.93 0 top
LOGO47  SFE_LOGO_NAME_FLAME.1_INCH  [SFE_LOGO_NAME_FLAME_.1]  90.55,76.45 0 top
LOGO48  OSHW-LOGOS  [OSHW-LOGO-S]  107.44,66.29 0 top
LOGO49  QWIIC_LOGO_5MM  [QWIIC_5MM]  113.67,66.93 0 top
LOGO50  SFE_LOGO_NAME_FLAME.1_INCH  [SFE_LOGO_NAME_FLAME_.1]  116.46,76.45 0 top
LOGO51  OSHW-LOGOS  [OSHW-LOGO-S]  133.35,66.29 0 top
LOGO52  QWIIC_LOGO_5MM  [QWIIC_5MM]  139.57,66.93 0 top
LOGO53  SFE_LOGO_NAME_FLAME.1_INCH  [SFE_LOGO_NAME_FLAME_.1]  142.37,76.45 0 top
LOGO54  OSHW-LOGOS  [OSHW-LOGO-S]  159.26,66.29 0 top
LOGO55  QWIIC_LOGO_5MM  [QWIIC_5MM]  10.03,92.84 0 top
LOGO56  SFE_LOGO_NAME_FLAME.1_INCH  [SFE_LOGO_NAME_FLAME_.1]  12.83,102.36 0 top
LOGO57  OSHW-LOGOS  [OSHW-LOGO-S]  29.72,92.2 0 top
LOGO58  QWIIC_LOGO_5MM  [QWIIC_5MM]  35.94,92.84 0 top
LOGO59  SFE_LOGO_NAME_FLAME.1_INCH  [SFE_LOGO_NAME_FLAME_.1]  38.73,102.36 0 top
LOGO60  OSHW-LOGOS  [OSHW-LOGO-S]  55.63,92.2 0 top
LOGO61  QWIIC_LOGO_5MM  [QWIIC_5MM]  61.85,92.84 0 top
LOGO62  SFE_LOGO_NAME_FLAME.1_INCH  [SFE_LOGO_NAME_FLAME_.1]  64.64,102.36 0 top
LOGO63  OSHW-LOGOS  [OSHW-LOGO-S]  81.53,92.2 0 top
LOGO64  QWIIC_LOGO_5MM  [QWIIC_5MM]  87.76,92.84 0 top
LOGO65  SFE_LOGO_NAME_FLAME.1_INCH  [SFE_LOGO_NAME_FLAME_.1]  90.55,102.36 0 top
LOGO66  OSHW-LOGOS  [OSHW-LOGO-S]  107.44,92.2 0 top
LOGO67  QWIIC_LOGO_5MM  [QWIIC_5MM]  113.67,92.84 0 top
LOGO68  SFE_LOGO_NAME_FLAME.1_INCH  [SFE_LOGO_NAME_FLAME_.1]  116.46,102.36 0 top
LOGO69  OSHW-LOGOS  [OSHW-LOGO-S]  133.35,92.2 0 top
LOGO70  QWIIC_LOGO_5MM  [QWIIC_5MM]  139.57,92.84 0 top
LOGO71  SFE_LOGO_NAME_FLAME.1_INCH  [SFE_LOGO_NAME_FLAME_.1]  142.37,102.36 0 top
LOGO72  OSHW-LOGOS  [OSHW-LOGO-S]  159.26,92.2 0 top
PWR  JUMPER-SMT_2_NC_TRACE_SILK  [SMT-JUMPER_2_NC_TRACE_SILK]  29.72,24 180 bottom
PWR1  JUMPER-SMT_2_NC_TRACE_SILK  [SMT-JUMPER_2_NC_TRACE_SILK]  55.63,24 180 bottom
PWR2  JUMPER-SMT_2_NC_TRACE_SILK  [SMT-JUMPER_2_NC_TRACE_SILK]  81.53,24 180 bottom
PWR3  JUMPER-SMT_2_NC_TRACE_SILK  [SMT-JUMPER_2_NC_TRACE_SILK]  107.44,24 180 bottom
PWR4  JUMPER-SMT_2_NC_TRACE_SILK  [SMT-JUMPER_2_NC_TRACE_SILK]  133.35,24 180 bottom
PWR5  JUMPER-SMT_2_NC_TRACE_SILK  [SMT-JUMPER_2_NC_TRACE_SILK]  159.26,24 180 bottom
PWR6  JUMPER-SMT_2_NC_TRACE_SILK  [SMT-JUMPER_2_NC_TRACE_SILK]  29.72,49.91 180 bottom
PWR7  JUMPER-SMT_2_NC_TRACE_SILK  [SMT-JUMPER_2_NC_TRACE_SILK]  55.63,49.91 180 bottom
PWR8  JUMPER-SMT_2_NC_TRACE_SILK  [SMT-JUMPER_2_NC_TRACE_SILK]  81.53,49.91 180 bottom
PWR9  JUMPER-SMT_2_NC_TRACE_SILK  [SMT-JUMPER_2_NC_TRACE_SILK]  107.44,49.91 180 bottom
PWR10  JUMPER-SMT_2_NC_TRACE_SILK  [SMT-JUMPER_2_NC_TRACE_SILK]  133.35,49.91 180 bottom
PWR11  JUMPER-SMT_2_NC_TRACE_SILK  [SMT-JUMPER_2_NC_TRACE_SILK]  159.26,49.91 180 bottom
PWR12  JUMPER-SMT_2_NC_TRACE_SILK  [SMT-JUMPER_2_NC_TRACE_SILK]  29.72,75.82 180 bottom
PWR13  JUMPER-SMT_2_NC_TRACE_SILK  [SMT-JUMPER_2_NC_TRACE_SILK]  55.63,75.82 180 bottom
PWR14  JUMPER-SMT_2_NC_TRACE_SILK  [SMT-JUMPER_2_NC_TRACE_SILK]  81.53,75.82 180 bottom
PWR15  JUMPER-SMT_2_NC_TRACE_SILK  [SMT-JUMPER_2_NC_TRACE_SILK]  107.44,75.82 180 bottom
PWR16  JUMPER-SMT_2_NC_TRACE_SILK  [SMT-JUMPER_2_NC_TRACE_SILK]  133.35,75.82 180 bottom
PWR17  JUMPER-SMT_2_NC_TRACE_SILK  [SMT-JUMPER_2_NC_TRACE_SILK]  159.26,75.82 180 bottom
PWR18  JUMPER-SMT_2_NC_TRACE_SILK  [SMT-JUMPER_2_NC_TRACE_SILK]  29.72,101.73 180 bottom
PWR19  JUMPER-SMT_2_NC_TRACE_SILK  [SMT-JUMPER_2_NC_TRACE_SILK]  55.63,101.73 180 bottom
PWR20  JUMPER-SMT_2_NC_TRACE_SILK  [SMT-JUMPER_2_NC_TRACE_SILK]  81.53,101.73 180 bottom
PWR21  JUMPER-SMT_2_NC_TRACE_SILK  [SMT-JUMPER_2_NC_TRACE_SILK]  107.44,101.73 180 bottom
PWR22  JUMPER-SMT_2_NC_TRACE_SILK  [SMT-JUMPER_2_NC_TRACE_SILK]  133.35,101.73 180 bottom
PWR23  JUMPER-SMT_2_NC_TRACE_SILK  [SMT-JUMPER_2_NC_TRACE_SILK]  159.26,101.73 180 bottom
R1  1k  [0603]  29.72,24 0 top
R2  2.2k  [0603]  15.75,17.02 0 top
R3  2.2k  [0603]  23.37,17.02 0 top
R4  10k  [0603]  23.37,22.1 180 top
R5  10k  [0603]  15.75,22.1 180 top
R6  10k  [0603]  25.91,13.21 0 top
R7  1k  [0603]  55.63,24 0 top
R8  2.2k  [0603]  41.66,17.02 0 top
R9  2.2k  [0603]  49.28,17.02 0 top
R10  10k  [0603]  49.28,22.1 180 top
R11  10k  [0603]  41.66,22.1 180 top
R12  10k  [0603]  51.82,13.21 0 top
R13  1k  [0603]  81.53,24 0 top
R14  2.2k  [0603]  67.56,17.02 0 top
R15  2.2k  [0603]  75.18,17.02 0 top
R16  10k  [0603]  75.18,22.1 180 top
R17  10k  [0603]  67.56,22.1 180 top
R18  10k  [0603]  77.72,13.21 0 top
R19  1k  [0603]  107.44,24 0 top
R20  2.2k  [0603]  93.47,17.02 0 top
R21  2.2k  [0603]  101.09,17.02 0 top
R22  10k  [0603]  101.09,22.1 180 top
R23  10k  [0603]  93.47,22.1 180 top
R24  10k  [0603]  103.63,13.21 0 top
R25  1k  [0603]  133.35,24 0 top
R26  2.2k  [0603]  119.38,17.02 0 top
R27  2.2k  [0603]  127,17.02 0 top
R28  10k  [0603]  127,22.1 180 top
R29  10k  [0603]  119.38,22.1 180 top
R30  10k  [0603]  129.54,13.21 0 top
R31  1k  [0603]  159.26,24 0 top
R32  2.2k  [0603]  145.29,17.02 0 top
R33  2.2k  [0603]  152.91,17.02 0 top
R34  10k  [0603]  152.91,22.1 180 top
R35  10k  [0603]  145.29,22.1 180 top
R36  10k  [0603]  155.45,13.21 0 top
R37  1k  [0603]  29.72,49.91 0 top
R38  2.2k  [0603]  15.75,42.93 0 top
R39  2.2k  [0603]  23.37,42.93 0 top
R40  10k  [0603]  23.37,48.01 180 top
R41  10k  [0603]  15.75,48.01 180 top
R42  10k  [0603]  25.91,39.12 0 top
R43  1k  [0603]  55.63,49.91 0 top
R44  2.2k  [0603]  41.66,42.93 0 top
R45  2.2k  [0603]  49.28,42.93 0 top
R46  10k  [0603]  49.28,48.01 180 top
R47  10k  [0603]  41.66,48.01 180 top
R48  10k  [0603]  51.82,39.12 0 top
R49  1k  [0603]  81.53,49.91 0 top
R50  2.2k  [0603]  67.56,42.93 0 top
R51  2.2k  [0603]  75.18,42.93 0 top
R52  10k  [0603]  75.18,48.01 180 top
R53  10k  [0603]  67.56,48.01 180 top
R54  10k  [0603]  77.72,39.12 0 top
R55  1k  [0603]  107.44,49.91 0 top
R56  2.2k  [0603]  93.47,42.93 0 top
R57  2.2k  [0603]  101.09,42.93 0 top
R58  10k  [0603]  101.09,48.01 180 top
R59  10k  [0603]  93.47,48.01 180 top
R60  10k  [0603]  103.63,39.12 0 top
R61  1k  [0603]  133.35,49.91 0 top
R62  2.2k  [0603]  119.38,42.93 0 top
R63  2.2k  [0603]  127,42.93 0 top
R64  10k  [0603]  127,48.01 180 top
R65  10k  [0603]  119.38,48.01 180 top
R66  10k  [0603]  129.54,39.12 0 top
R67  1k  [0603]  159.26,49.91 0 top
R68  2.2k  [0603]  145.29,42.93 0 top
R69  2.2k  [0603]  152.91,42.93 0 top
R70  10k  [0603]  152.91,48.01 180 top
R71  10k  [0603]  145.29,48.01 180 top
R72  10k  [0603]  155.45,39.12 0 top
R73  1k  [0603]  29.72,75.82 0 top
R74  2.2k  [0603]  15.75,68.83 0 top
R75  2.2k  [0603]  23.37,68.83 0 top
R76  10k  [0603]  23.37,73.91 180 top
R77  10k  [0603]  15.75,73.91 180 top
R78  10k  [0603]  25.91,65.02 0 top
R79  1k  [0603]  55.63,75.82 0 top
R80  2.2k  [0603]  41.66,68.83 0 top
R81  2.2k  [0603]  49.28,68.83 0 top
R82  10k  [0603]  49.28,73.91 180 top
R83  10k  [0603]  41.66,73.91 180 top
R84  10k  [0603]  51.82,65.02 0 top
R85  1k  [0603]  81.53,75.82 0 top
R86  2.2k  [0603]  67.56,68.83 0 top
R87  2.2k  [0603]  75.18,68.83 0 top
R88  10k  [0603]  75.18,73.91 180 top
R89  10k  [0603]  67.56,73.91 180 top
R90  10k  [0603]  77.72,65.02 0 top
R91  1k  [0603]  107.44,75.82 0 top
R92  2.2k  [0603]  93.47,68.83 0 top
R93  2.2k  [0603]  101.09,68.83 0 top
R94  10k  [0603]  101.09,73.91 180 top
R95  10k  [0603]  93.47,73.91 180 top
R96  10k  [0603]  103.63,65.02 0 top
R97  1k  [0603]  133.35,75.82 0 top
R98  2.2k  [0603]  119.38,68.83 0 top
R99  2.2k  [0603]  127,68.83 0 top
R100  10k  [0603]  127,73.91 180 top
R101  10k  [0603]  119.38,73.91 180 top
R102  10k  [0603]  129.54,65.02 0 top
R103  1k  [0603]  159.26,75.82 0 top
R104  2.2k  [0603]  145.29,68.83 0 top
R105  2.2k  [0603]  152.91,68.83 0 top
R106  10k  [0603]  152.91,73.91 180 top
R107  10k  [0603]  145.29,73.91 180 top
R108  10k  [0603]  155.45,65.02 0 top
R109  1k  [0603]  29.72,101.73 0 top
R110  2.2k  [0603]  15.75,94.74 0 top
R111  2.2k  [0603]  23.37,94.74 0 top
R112  10k  [0603]  23.37,99.82 180 top
R113  10k  [0603]  15.75,99.82 180 top
R114  10k  [0603]  25.91,90.93 0 top
R115  1k  [0603]  55.63,101.73 0 top
R116  2.2k  [0603]  41.66,94.74 0 top
R117  2.2k  [0603]  49.28,94.74 0 top
R118  10k  [0603]  49.28,99.82 180 top
R119  10k  [0603]  41.66,99.82 180 top
R120  10k  [0603]  51.82,90.93 0 top
R121  1k  [0603]  81.53,101.73 0 top
R122  2.2k  [0603]  67.56,94.74 0 top
R123  2.2k  [0603]  75.18,94.74 0 top
R124  10k  [0603]  75.18,99.82 180 top
R125  10k  [0603]  67.56,99.82 180 top
R126  10k  [0603]  77.72,90.93 0 top
R127  1k  [0603]  107.44,101.73 0 top
R128  2.2k  [0603]  93.47,94.74 0 top
R129  2.2k  [0603]  101.09,94.74 0 top
R130  10k  [0603]  101.09,99.82 180 top
R131  10k  [0603]  93.47,99.82 180 top
R132  10k  [0603]  103.63,90.93 0 top
R133  1k  [0603]  133.35,101.73 0 top
R134  2.2k  [0603]  119.38,94.74 0 top
R135  2.2k  [0603]  127,94.74 0 top
R136  10k  [0603]  127,99.82 180 top
R137  10k  [0603]  119.38,99.82 180 top
R138  10k  [0603]  129.54,90.93 0 top
R139  1k  [0603]  159.26,101.73 0 top
R140  2.2k  [0603]  145.29,94.74 0 top
R141  2.2k  [0603]  152.91,94.74 0 top
R142  10k  [0603]  152.91,99.82 180 top
R143  10k  [0603]  145.29,99.82 180 top
R144  10k  [0603]  155.45,90.93 0 top
U1  BMA400  [BMA400]  19.56,19.56 90 top
U2  BMA400  [BMA400]  45.47,19.56 90 top
U3  BMA400  [BMA400]  71.37,19.56 90 top
U4  BMA400  [BMA400]  97.28,19.56 90 top
U5  BMA400  [BMA400]  123.19,19.56 90 top
U6  BMA400  [BMA400]  149.1,19.56 90 top
U7  BMA400  [BMA400]  19.56,45.47 90 top
U8  BMA400  [BMA400]  45.47,45.47 90 top
U9  BMA400  [BMA400]  71.37,45.47 90 top
U10  BMA400  [BMA400]  97.28,45.47 90 top
U11  BMA400  [BMA400]  123.19,45.47 90 top
U12  BMA400  [BMA400]  149.1,45.47 90 top
U13  BMA400  [BMA400]  19.56,71.37 90 top
U14  BMA400  [BMA400]  45.47,71.37 90 top
U15  BMA400  [BMA400]  71.37,71.37 90 top
U16  BMA400  [BMA400]  97.28,71.37 90 top
U17  BMA400  [BMA400]  123.19,71.37 90 top
U18  BMA400  [BMA400]  149.1,71.37 90 top
U19  BMA400  [BMA400]  19.56,97.28 90 top
U20  BMA400  [BMA400]  45.47,97.28 90 top
U21  BMA400  [BMA400]  71.37,97.28 90 top
U22  BMA400  [BMA400]  97.28,97.28 90 top
U23  BMA400  [BMA400]  123.19,97.28 90 top
U24  BMA400  [BMA400]  149.1,97.28 90 top
U$1  [PWR0]  29.72,27.18 0 top
U$2  [X2114]  24,27.81 0 bottom
U$3  [Y2115]  25.27,30.48 0 bottom
U$4  [#INT1_#0]  20.83,30.99 90 top
U$5  [#INT2_#0]  18.29,30.99 90 top
U$6  [#_3V3#6]  15.75,8.13 90 top
U$7  [#_SDA#PICO#5]  18.29,8.13 90 top
U$8  [#_#CS##2]  25.91,8.13 90 top
U$9  [#_SCL#SCK#3]  20.83,8.13 90 top
U$10  [#_GND#0]  13.21,8.13 90 bottom
U$11  [#_3V3#0]  15.75,8.13 90 bottom
U$12  [#_SDA#PICO#0]  18.29,8.13 90 bottom
U$13  [#_SCL#SCK#0]  20.83,8.13 90 bottom
U$14  [#_ADR#POCI#0]  23.37,8.13 90 bottom
U$15  [#_#CS##0]  25.91,8.13 90 bottom
U$16  [#I2C#0]  19.56,19.94 0 bottom
U$17  [#ADR#0]  19.56,23.75 0 bottom
U$18  [#0X15#0]  18.16,22.1 0 bottom
U$19  [#0X14#0]  20.95,22.1 0 bottom
U$20  [#INT1_#0]  20.83,30.99 90 bottom
U$21  [#INT2_#0]  18.29,30.99 90 bottom
U$22  [#PWR#0]  28.83,24 0 bottom
U$23  [BMA4000]  23.75,24.64 0 top
U$24  [BMA4000]  11.94,24 0 bottom
U$25  [##CS##0]  28.83,13.21 0 bottom
U$26  [SFE_LOGO_FLAME_.1]  10.67,13.21 0 bottom
U$27  [#_ADR#POCI#1]  23.37,8.13 90 top
U$28  [#_GND#6]  13.21,8.13 90 top
U$29  [Z2116]  23.37,30.99 0 bottom
U$30  [PWR0]  55.63,27.18 0 top
U$31  [#INT1_#0]  46.74,30.99 90 top
U$32  [#INT2_#0]  44.2,30.99 90 top
U$33  [#_GND#0]  39.12,8.13 90 bottom
U$34  [X2114]  24.13,27.81 0 top
U$35  [Y2115]  25.4,30.48 0 top
U$36  [Z2116]  23.37,30.99 0 top
U$37  [#_3V3#0]  41.66,8.13 90 bottom
U$38  [#_SDA#PICO#0]  44.2,8.13 90 bottom
U$39  [#_SCL#SCK#0]  46.74,8.13 90 bottom
U$40  [#_ADR#POCI#0]  49.28,8.13 90 bottom
U$41  [#_#CS##0]  51.82,8.13 90 bottom
U$42  [#I2C#0]  45.47,19.94 0 bottom
U$43  [#ADR#0]  45.47,23.75 0 bottom
U$44  [#0X15#0]  44.07,22.1 0 bottom
U$45  [#0X14#0]  46.86,22.1 0 bottom
U$46  [#INT1_#0]  46.74,30.99 90 bottom
U$47  [#INT2_#0]  44.2,30.99 90 bottom
U$48  [#PWR#0]  54.74,24 0 bottom
U$49  [BMA4000]  49.66,24.64 0 top
U$50  [BMA4000]  37.85,24 0 bottom
U$51  [##CS##0]  54.74,13.21 0 bottom
U$52  [SFE_LOGO_FLAME_.1]  36.58,13.21 0 bottom
U$53  [#_ADR#POCI#1]  49.28,8.13 90 top
U$54  [#_#CS##2]  51.82,8.13 90 top
U$55  [#_SCL#SCK#3]  46.74,8.13 90 top
U$56  [#_SDA#PICO#5]  44.2,8.13 90 top
U$57  [#_3V3#6]  41.66,8.13 90 top
U$58  [#_GND#6]  39.12,8.13 90 top
U$59  [X2114]  50.04,27.81 0 top
U$60  [Y2115]  51.31,30.48 0 top
U$61  [Z2116]  49.28,30.99 0 top
U$62  [X2114]  49.91,27.81 0 bottom
U$63  [Y2115]  51.18,30.48 0 bottom
U$64  [Z2116]  49.28,30.99 0 bottom
U$65  [PWR0]  81.53,27.18 0 top
U$66  [#INT1_#0]  72.64,30.99 90 top
U$67  [#INT2_#0]  70.1,30.99 90 top
U$68  [#_GND#0]  65.02,8.13 90 bottom
U$69  [#_3V3#0]  67.56,8.13 90 bottom
U$70  [#_SDA#PICO#0]  70.1,8.13 90 bottom
U$71  [#_SCL#SCK#0]  72.64,8.13 90 bottom
U$72  [#_ADR#POCI#0]  75.18,8.13 90 bottom
U$73  [#_#CS##0]  77.72,8.13 90 bottom
U$74  [#I2C#0]  71.37,19.94 0 bottom
U$75  [#ADR#0]  71.37,23.75 0 bottom
U$76  [#0X15#0]  69.98,22.1 0 bottom
U$77  [#0X14#0]  72.77,22.1 0 bottom
U$78  [#INT1_#0]  72.64,30.99 90 bottom
U$79  [#INT2_#0]  70.1,30.99 90 bottom
U$80  [#PWR#0]  80.65,24 0 bottom
U$81  [BMA4000]  75.56,24.64 0 top
U$82  [BMA4000]  63.75,24 0 bottom
U$83  [##CS##0]  80.65,13.21 0 bottom
U$84  [SFE_LOGO_FLAME_.1]  62.48,13.21 0 bottom
U$85  [#_ADR#POCI#1]  75.18,8.13 90 top
U$86  [#_#CS##2]  77.72,8.13 90 top
U$87  [#_SCL#SCK#3]  72.64,8.13 90 top
U$88  [#_SDA#PICO#5]  70.1,8.13 90 top
U$89  [#_3V3#6]  67.56,8.13 90 top
U$90  [#_GND#6]  65.02,8.13 90 top
U$91  [X2114]  75.95,27.81 0 top
U$92  [Y2115]  77.22,30.48 0 top
U$93  [Z2116]  75.18,30.99 0 top
U$94  [X2114]  75.82,27.81 0 bottom
U$95  [Y2115]  77.09,30.48 0 bottom
U$96  [Z2116]  75.18,30.99 0 bottom
U$97  [PWR0]  107.44,27.18 0 top
U$98  [#INT1_#0]  98.55,30.99 90 top
U$99  [#INT2_#0]  96.01,30.99 90 top
U$100  [#_GND#0]  90.93,8.13 90 bottom
U$101  [#_3V3#0]  93.47,8.13 90 bottom
U$102  [#_SDA#PICO#0]  96.01,8.13 90 bottom
U$103  [#_SCL#SCK#0]  98.55,8.13 90 bottom
U$104  [#_ADR#POCI#0]  101.09,8.13 90 bottom
U$105  [#_#CS##0]  103.63,8.13 90 bottom
U$106  [#I2C#0]  97.28,19.94 0 bottom
U$107  [#ADR#0]  97.28,23.75 0 bottom
U$108  [#0X15#0]  95.89,22.1 0 bottom
U$109  [#0X14#0]  98.68,22.1 0 bottom
U$110  [#INT1_#0]  98.55,30.99 90 bottom
U$111  [#INT2_#0]  96.01,30.99 90 bottom
U$112  [#PWR#0]  106.55,24 0 bottom
U$113  [BMA4000]  101.47,24.64 0 top
U$114  [BMA4000]  89.66,24 0 bottom
U$115  [##CS##0]  106.55,13.21 0 bottom
U$116  [SFE_LOGO_FLAME_.1]  88.39,13.21 0 bottom
U$117  [#_ADR#POCI#1]  101.09,8.13 90 top
U$118  [#_#CS##2]  103.63,8.13 90 top
U$119  [#_SCL#SCK#3]  98.55,8.13 90 top
U$120  [#_SDA#PICO#5]  96.01,8.13 90 top
U$121  [#_3V3#6]  93.47,8.13 90 top
U$122  [#_GND#6]  90.93,8.13 90 top
U$123  [X2114]  101.85,27.81 0 top
U$124  [Y2115]  103.12,30.48 0 top
U$125  [Z2116]  101.09,30.99 0 top
U$126  [X2114]  101.73,27.81 0 bottom
U$127  [Y2115]  103,30.48 0 bottom
U$128  [Z2116]  101.09,30.99 0 bottom
U$129  [PWR0]  133.35,27.18 0 top
U$130  [#INT1_#0]  124.46,30.99 90 top
U$131  [#INT2_#0]  121.92,30.99 90 top
U$132  [#_GND#0]  116.84,8.13 90 bottom
U$133  [#_3V3#0]  119.38,8.13 90 bottom
U$134  [#_SDA#PICO#0]  121.92,8.13 90 bottom
U$135  [#_SCL#SCK#0]  124.46,8.13 90 bottom
U$136  [#_ADR#POCI#0]  127,8.13 90 bottom
U$137  [#_#CS##0]  129.54,8.13 90 bottom
U$138  [#I2C#0]  123.19,19.94 0 bottom
U$139  [#ADR#0]  123.19,23.75 0 bottom
U$140  [#0X15#0]  121.79,22.1 0 bottom
U$141  [#0X14#0]  124.59,22.1 0 bottom
U$142  [#INT1_#0]  124.46,30.99 90 bottom
U$143  [#INT2_#0]  121.92,30.99 90 bottom
U$144  [#PWR#0]  132.46,24 0 bottom
U$145  [BMA4000]  127.38,24.64 0 top
U$146  [BMA4000]  115.57,24 0 bottom
U$147  [##CS##0]  132.46,13.21 0 bottom
U$148  [SFE_LOGO_FLAME_.1]  114.3,13.21 0 bottom
U$149  [#_ADR#POCI#1]  127,8.13 90 top
U$150  [#_#CS##2]  129.54,8.13 90 top
U$151  [#_SCL#SCK#3]  124.46,8.13 90 top
U$152  [#_SDA#PICO#5]  121.92,8.13 90 top
U$153  [#_3V3#6]  119.38,8.13 90 top
U$154  [#_GND#6]  116.84,8.13 90 top
U$155  [X2114]  127.76,27.81 0 top
U$156  [Y2115]  129.03,30.48 0 top
U$157  [Z2116]  127,30.99 0 top
U$158  [X2114]  127.64,27.81 0 bottom
U$159  [Y2115]  128.91,30.48 0 bottom
U$160  [Z2116]  127,30.99 0 bottom
U$161  [PWR0]  159.26,27.18 0 top
U$162  [#INT1_#0]  150.37,30.99 90 top
U$163  [#INT2_#0]  147.83,30.99 90 top
U$164  [#_GND#0]  142.75,8.13 90 bottom
U$165  [#_3V3#0]  145.29,8.13 90 bottom
U$166  [#_SDA#PICO#0]  147.83,8.13 90 bottom
U$167  [#_SCL#SCK#0]  150.37,8.13 90 bottom
U$168  [#_ADR#POCI#0]  152.91,8.13 90 bottom
U$169  [#_#CS##0]  155.45,8.13 90 bottom
U$170  [#I2C#0]  149.1,19.94 0 bottom
U$171  [#ADR#0]  149.1,23.75 0 bottom
U$172  [#0X15#0]  147.7,22.1 0 bottom
U$173  [#0X14#0]  150.5,22.1 0 bottom
U$174  [#INT1_#0]  150.37,30.99 90 bottom
U$175  [#INT2_#0]  147.83,30.99 90 bottom
U$176  [#PWR#0]  158.37,24 0 bottom
U$177  [BMA4000]  153.29,24.64 0 top
U$178  [BMA4000]  141.48,24 0 bottom
U$179  [##CS##0]  158.37,13.21 0 bottom
U$180  [SFE_LOGO_FLAME_.1]  140.21,13.21 0 bottom
U$181  [#_ADR#POCI#1]  152.91,8.13 90 top
U$182  [#_#CS##2]  155.45,8.13 90 top
U$183  [#_SCL#SCK#3]  150.37,8.13 90 top
U$184  [#_SDA#PICO#5]  147.83,8.13 90 top
U$185  [#_3V3#6]  145.29,8.13 90 top
U$186  [#_GND#6]  142.75,8.13 90 top
U$187  [X2114]  153.67,27.81 0 top
U$188  [Y2115]  154.94,30.48 0 top
U$189  [Z2116]  152.91,30.99 0 top
U$190  [X2114]  153.54,27.81 0 bottom
U$191  [Y2115]  154.81,30.48 0 bottom
U$192  [Z2116]  152.91,30.99 0 bottom
U$193  [PWR0]  29.72,53.09 0 top
U$194  [#INT1_#0]  20.83,56.9 90 top
U$195  [#INT2_#0]  18.29,56.9 90 top
U$196  [#_GND#0]  13.21,34.04 90 bottom
U$197  [#_3V3#0]  15.75,34.04 90 bottom
U$198  [#_SDA#PICO#0]  18.29,34.04 90 bottom
U$199  [#_SCL#SCK#0]  20.83,34.04 90 bottom
U$200  [#_ADR#POCI#0]  23.37,34.04 90 bottom
U$201  [#_#CS##0]  25.91,34.04 90 bottom
U$202  [#I2C#0]  19.56,45.85 0 bottom
U$203  [#ADR#0]  19.56,49.66 0 bottom
U$204  [#0X15#0]  18.16,48.01 0 bottom
U$205  [#0X14#0]  20.95,48.01 0 bottom
U$206  [#INT1_#0]  20.83,56.9 90 bottom
U$207  [#INT2_#0]  18.29,56.9 90 bottom
U$208  [#PWR#0]  28.83,49.91 0 bottom
U$209  [BMA4000]  23.75,50.55 0 top
U$210  [BMA4000]  11.94,49.91 0 bottom
U$211  [##CS##0]  28.83,39.12 0 bottom
U$212  [SFE_LOGO_FLAME_.1]  10.67,39.12 0 bottom
U$213  [#_ADR#POCI#1]  23.37,34.04 90 top
U$214  [#_#CS##2]  25.91,34.04 90 top
U$215  [#_SCL#SCK#3]  20.83,34.04 90 top
U$216  [#_SDA#PICO#5]  18.29,34.04 90 top
U$217  [#_3V3#6]  15.75,34.04 90 top
U$218  [#_GND#6]  13.21,34.04 90 top
U$219  [X2114]  24.13,53.72 0 top
U$220  [Y2115]  25.4,56.39 0 top
U$221  [Z2116]  23.37,56.9 0 top
U$222  [X2114]  24,53.72 0 bottom
U$223  [Y2115]  25.27,56.39 0 bottom
U$224  [Z2116]  23.37,56.9 0 bottom
U$225  [PWR0]  55.63,53.09 0 top
U$226  [#INT1_#0]  46.74,56.9 90 top
U$227  [#INT2_#0]  44.2,56.9 90 top
U$228  [#_GND#0]  39.12,34.04 90 bottom
U$229  [#_3V3#0]  41.66,34.04 90 bottom
U$230  [#_SDA#PICO#0]  44.2,34.04 90 bottom
U$231  [#_SCL#SCK#0]  46.74,34.04 90 bottom
U$232  [#_ADR#POCI#0]  49.28,34.04 90 bottom
U$233  [#_#CS##0]  51.82,34.04 90 bottom
U$234  [#I2C#0]  45.47,45.85 0 bottom
U$235  [#ADR#0]  45.47,49.66 0 bottom
U$236  [#0X15#0]  44.07,48.01 0 bottom
U$237  [#0X14#0]  46.86,48.01 0 bottom
U$238  [#INT1_#0]  46.74,56.9 90 bottom
U$239  [#INT2_#0]  44.2,56.9 90 bottom
U$240  [#PWR#0]  54.74,49.91 0 bottom
U$241  [BMA4000]  49.66,50.55 0 top
U$242  [BMA4000]  37.85,49.91 0 bottom
U$243  [##CS##0]  54.74,39.12 0 bottom
U$244  [SFE_LOGO_FLAME_.1]  36.58,39.12 0 bottom
U$245  [#_ADR#POCI#1]  49.28,34.04 90 top
U$246  [#_#CS##2]  51.82,34.04 90 top
U$247  [#_SCL#SCK#3]  46.74,34.04 90 top
U$248  [#_SDA#PICO#5]  44.2,34.04 90 top
U$249  [#_3V3#6]  41.66,34.04 90 top
U$250  [#_GND#6]  39.12,34.04 90 top
U$251  [X2114]  50.04,53.72 0 top
U$252  [Y2115]  51.31,56.39 0 top
U$253  [Z2116]  49.28,56.9 0 top
U$254  [X2114]  49.91,53.72 0 bottom
U$255  [Y2115]  51.18,56.39 0 bottom
U$256  [Z2116]  49.28,56.9 0 bottom
U$257  [PWR0]  81.53,53.09 0 top
U$258  [#INT1_#0]  72.64,56.9 90 top
U$259  [#INT2_#0]  70.1,56.9 90 top
U$260  [#_GND#0]  65.02,34.04 90 bottom
U$261  [#_3V3#0]  67.56,34.04 90 bottom
U$262  [#_SDA#PICO#0]  70.1,34.04 90 bottom
U$263  [#_SCL#SCK#0]  72.64,34.04 90 bottom
U$264  [#_ADR#POCI#0]  75.18,34.04 90 bottom